# Altium PCB slave-14-mc33775.PcbDoc (part 1 of 5)
Units mil, origin at the board's own origin, x right, y up, seen from the top; angles counter-clockwise.
Board outline 6512.5 x 4562.01 mil, 6 copper layers (Top Copper, Supply, Signal Layer 1, Signal Layer 2, GND, Bot Copper), stack 69.773 mil thick; 427 components, 0 nets, 1131 pads, 1672 vias.
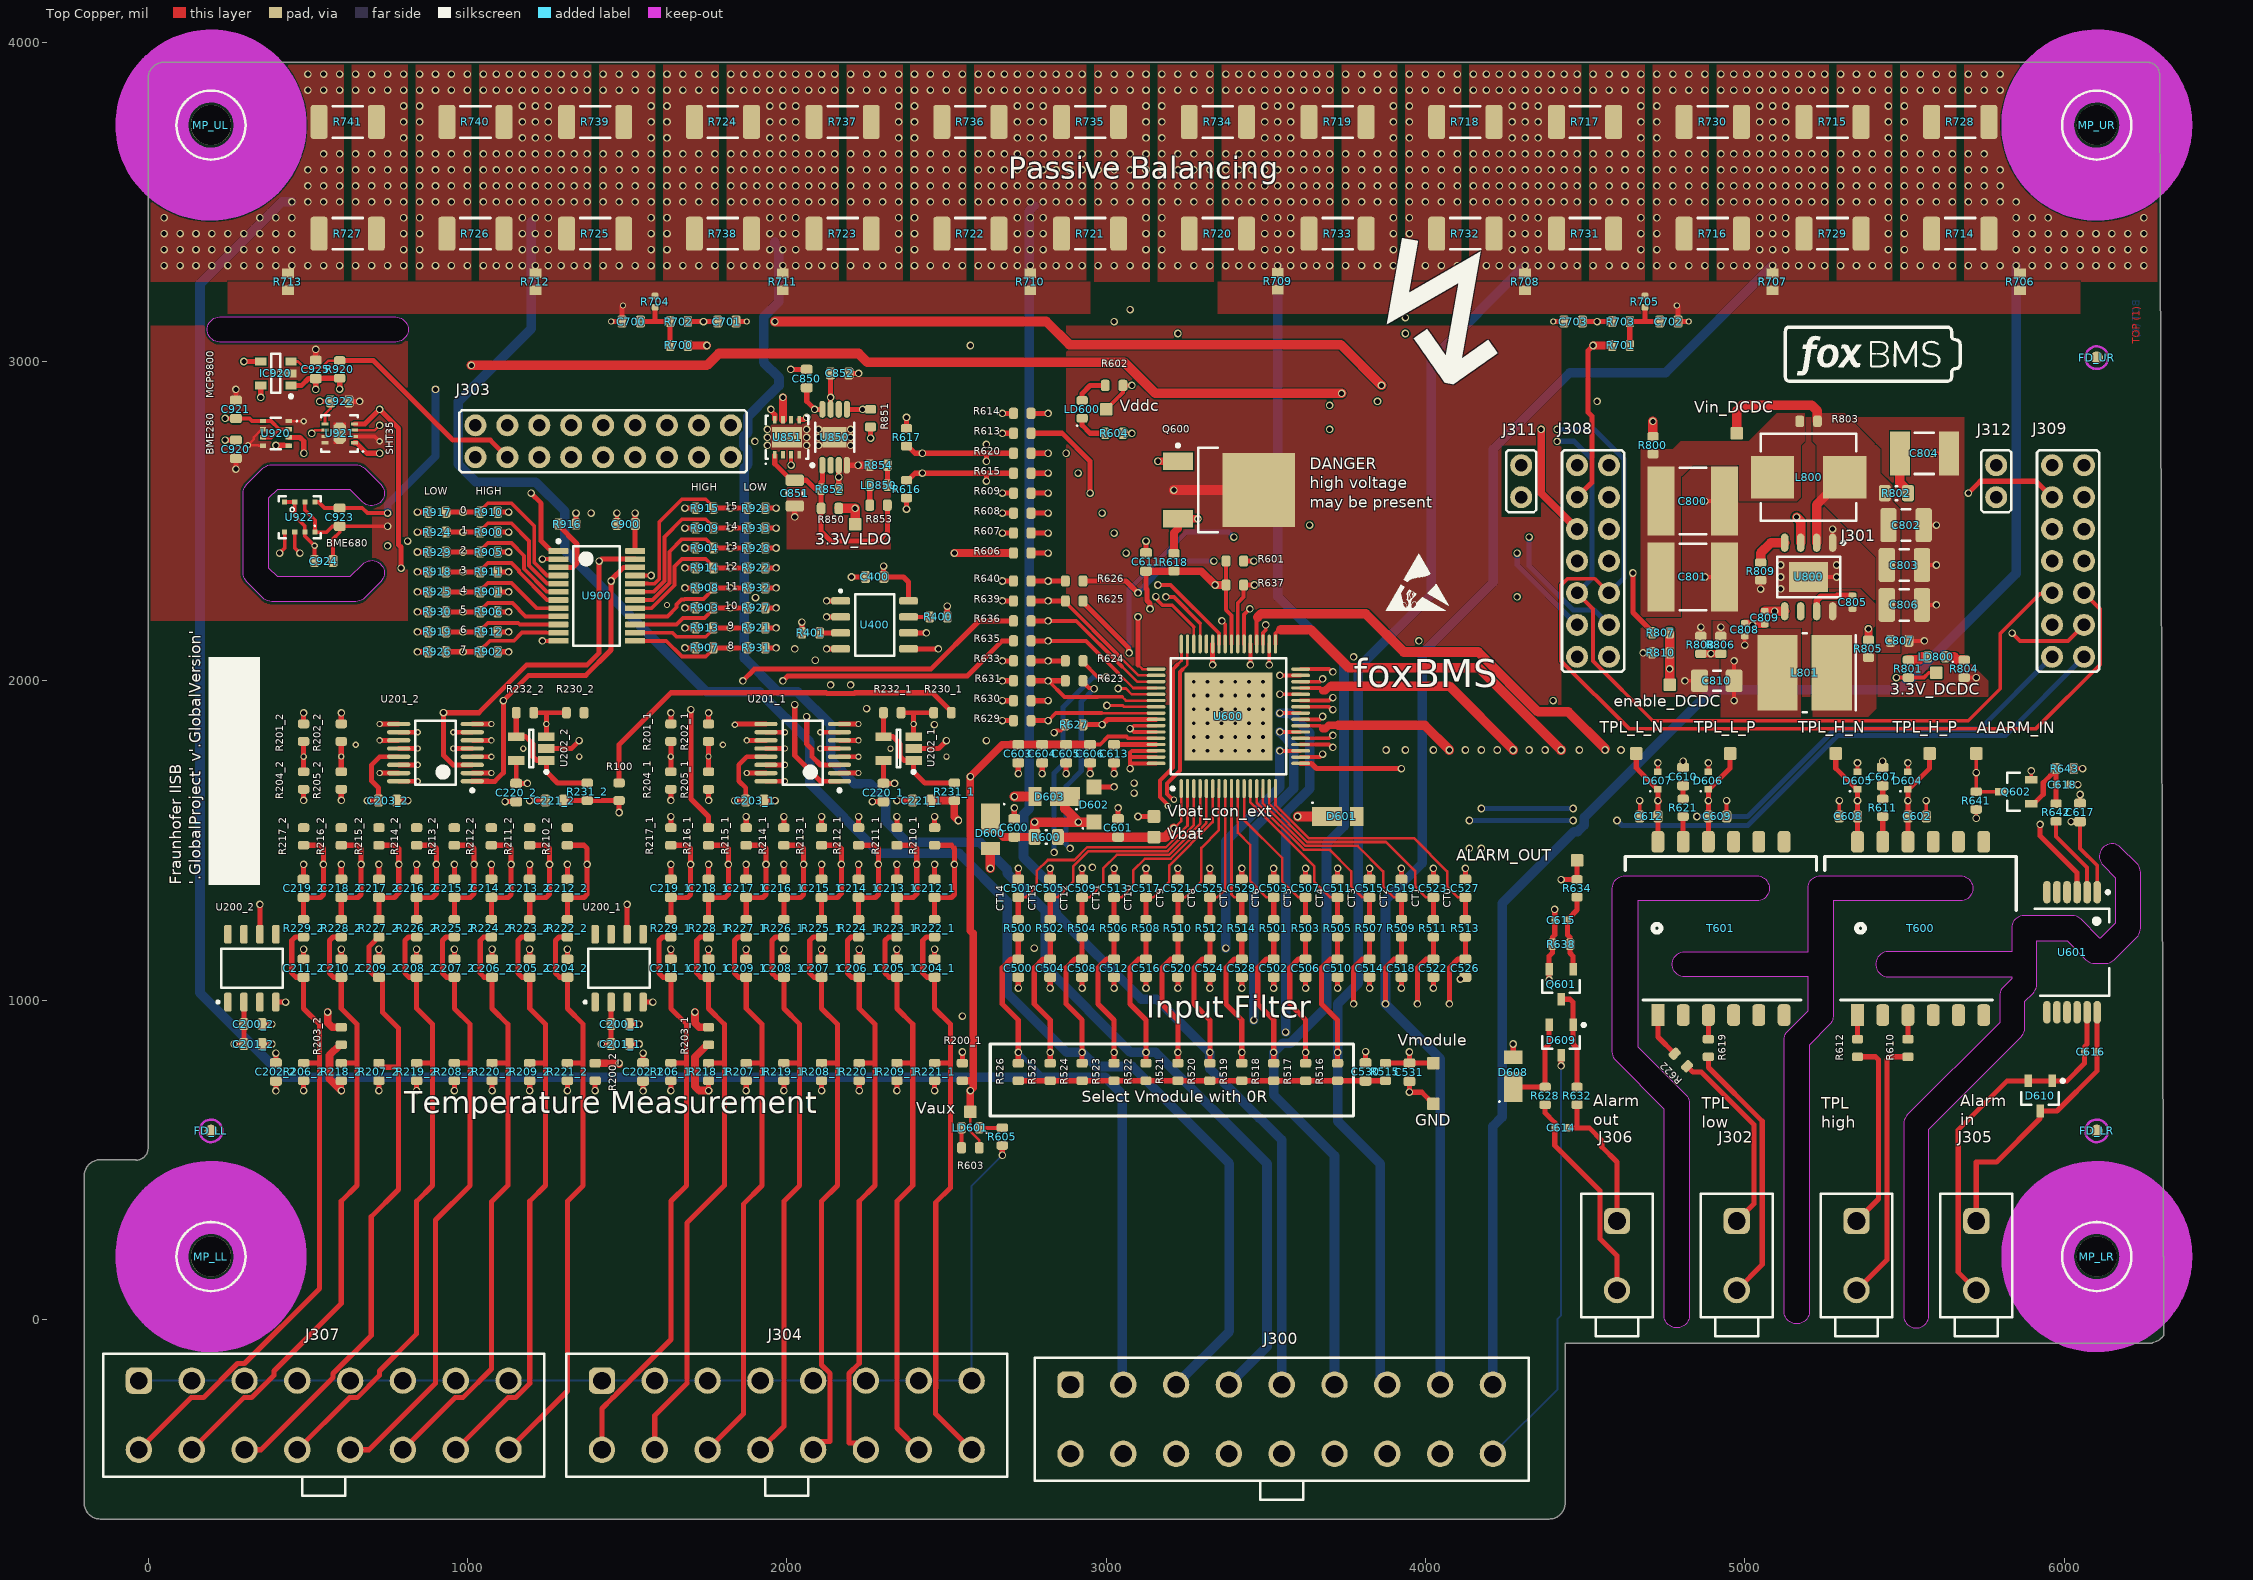
[diagram p0: Top Copper view]
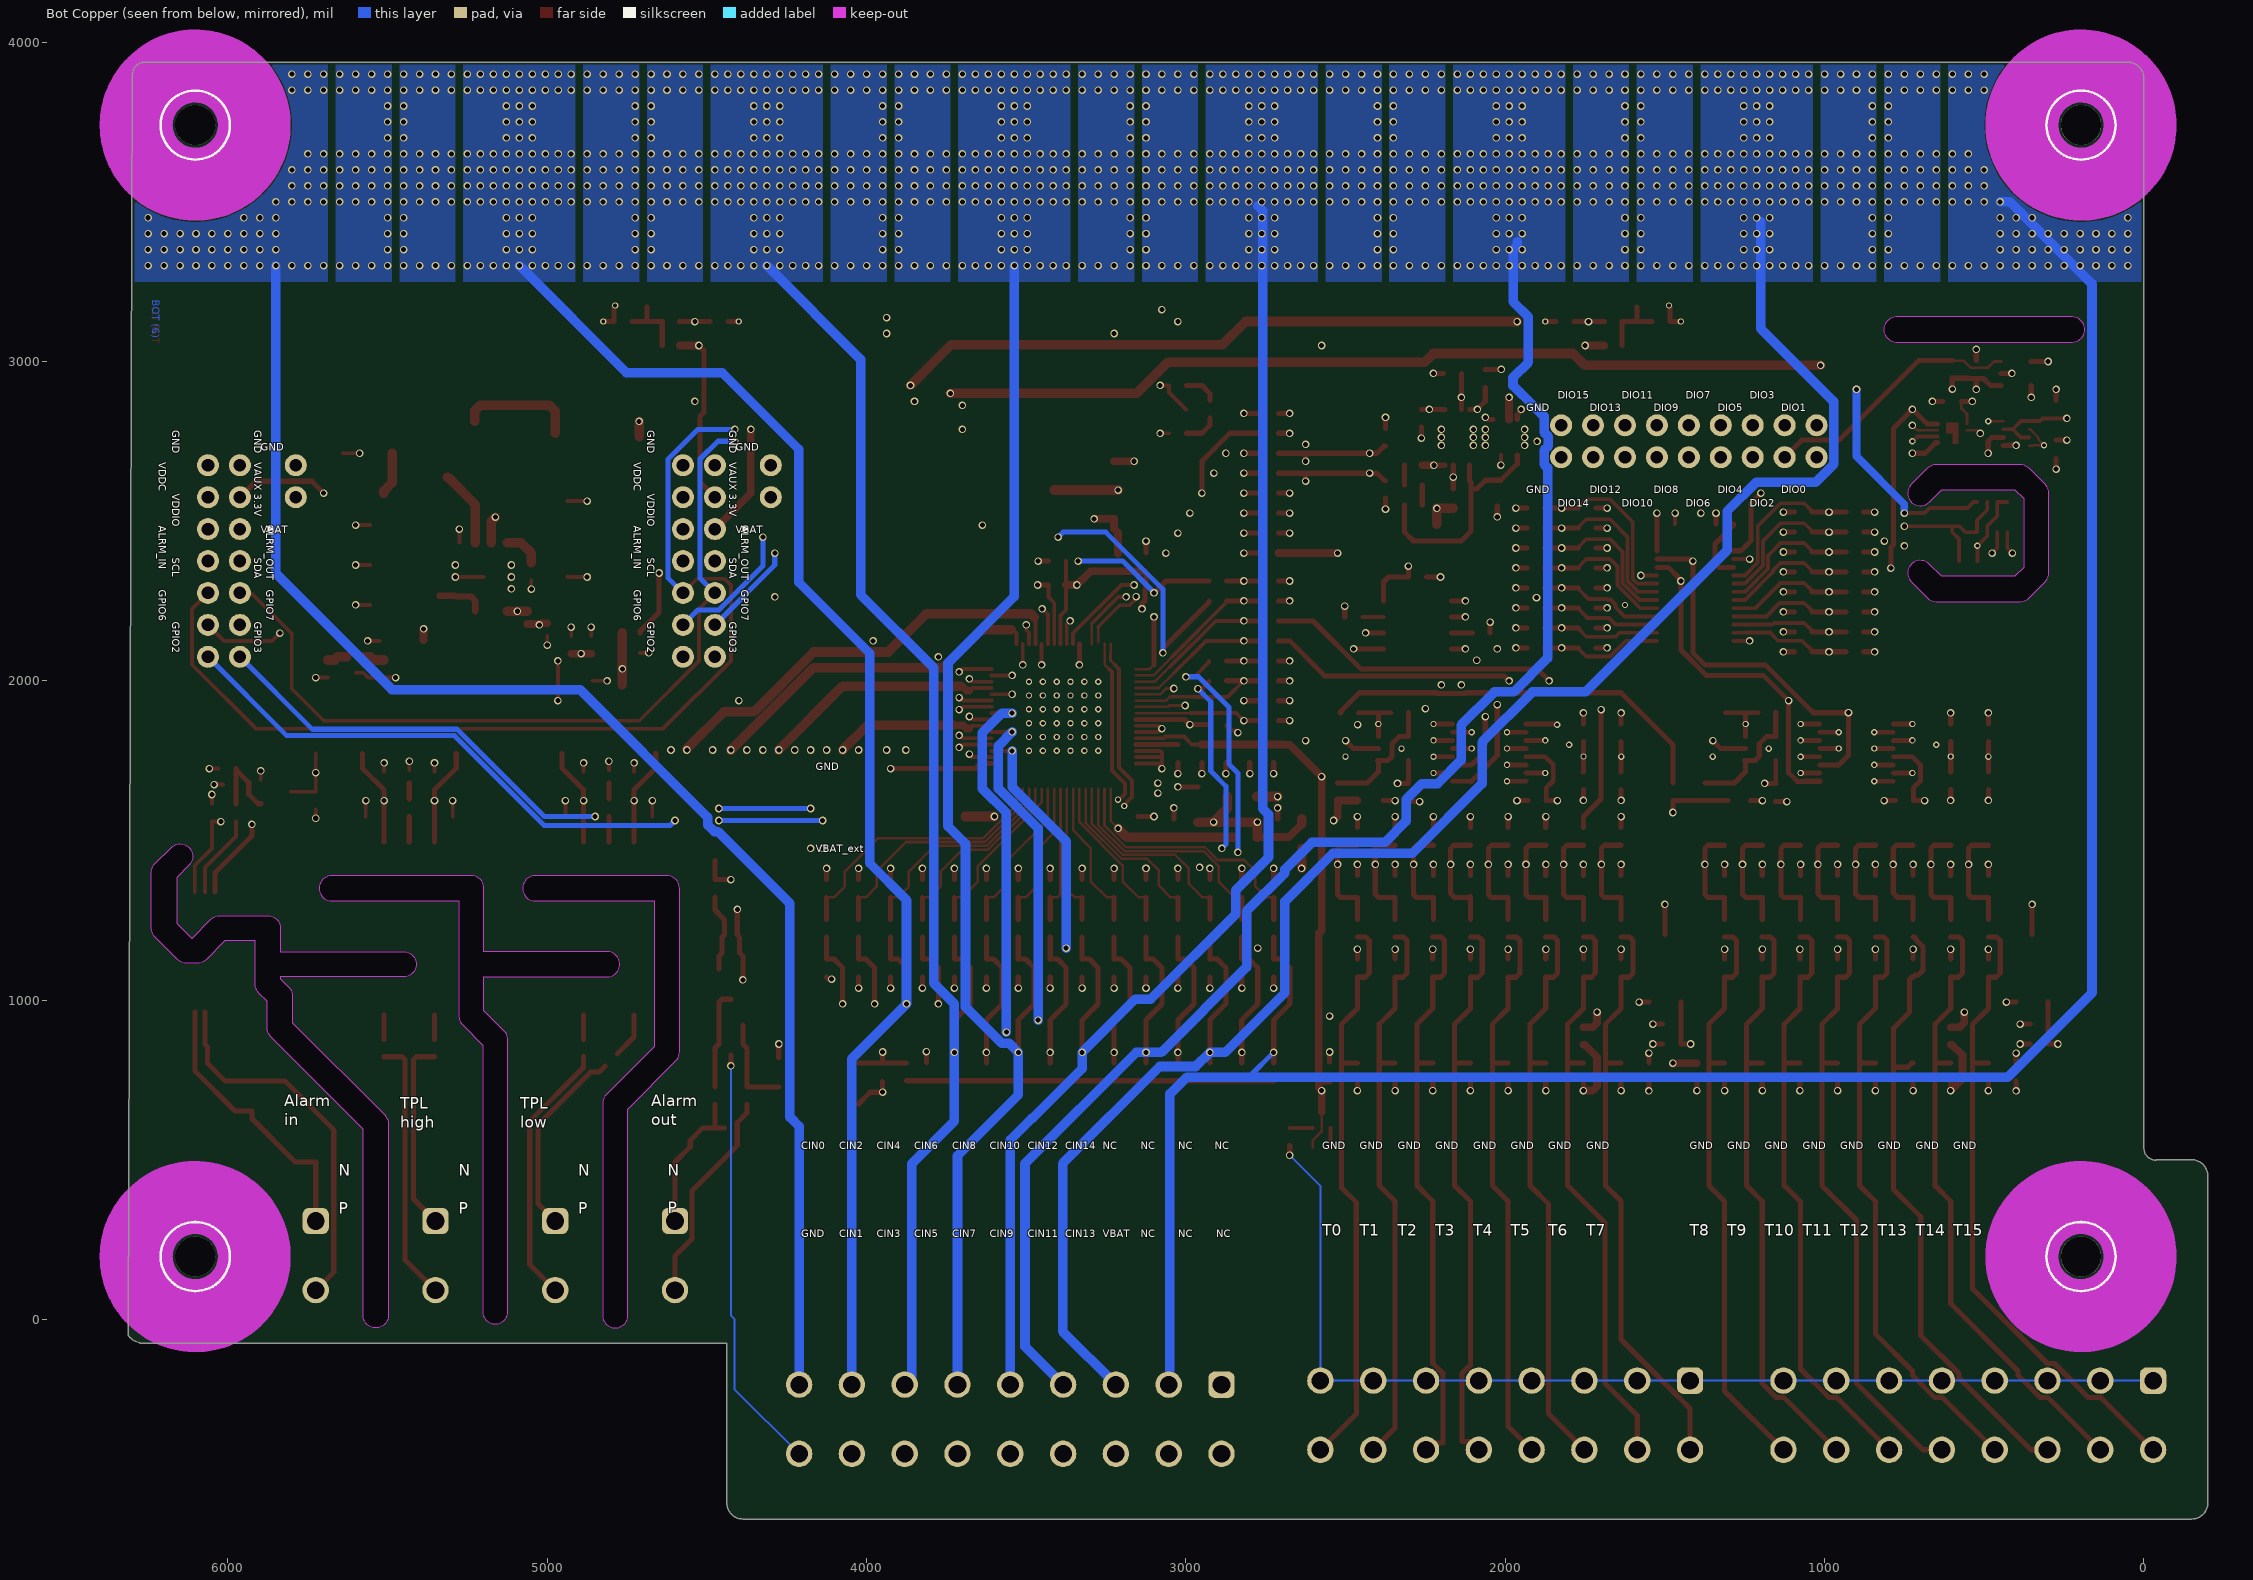
[diagram p1: Bot Copper view, seen from below]
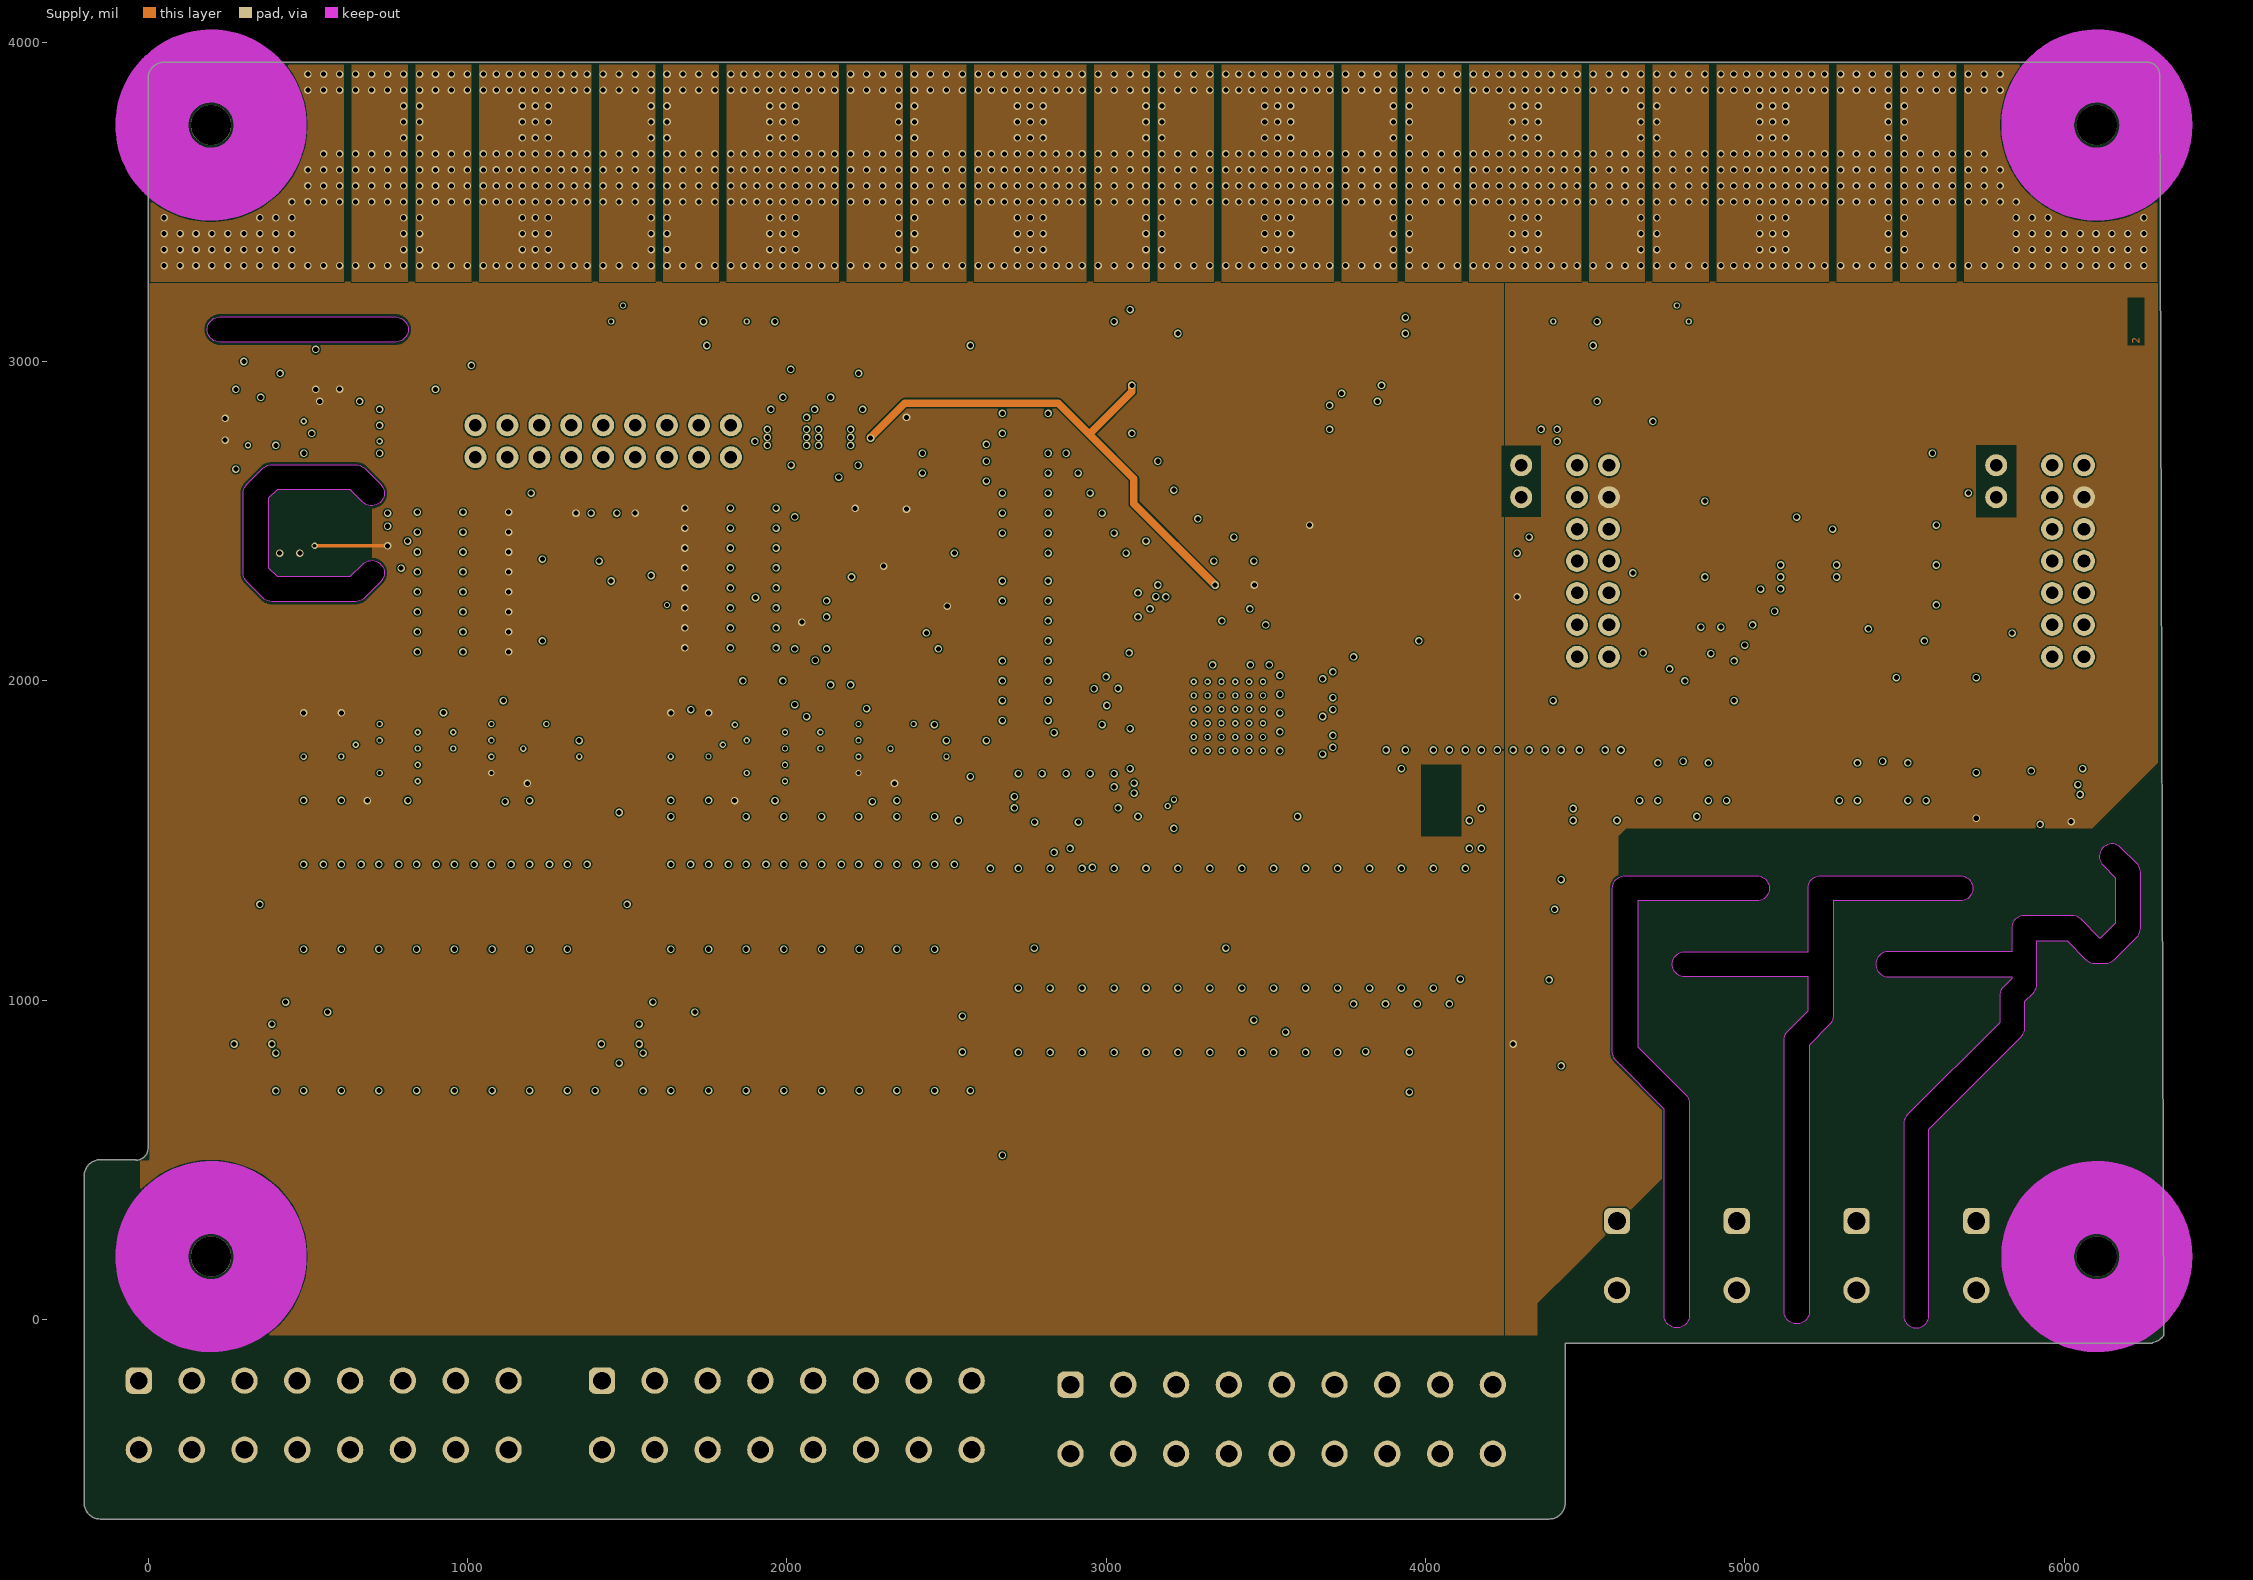
[diagram p2: Supply]
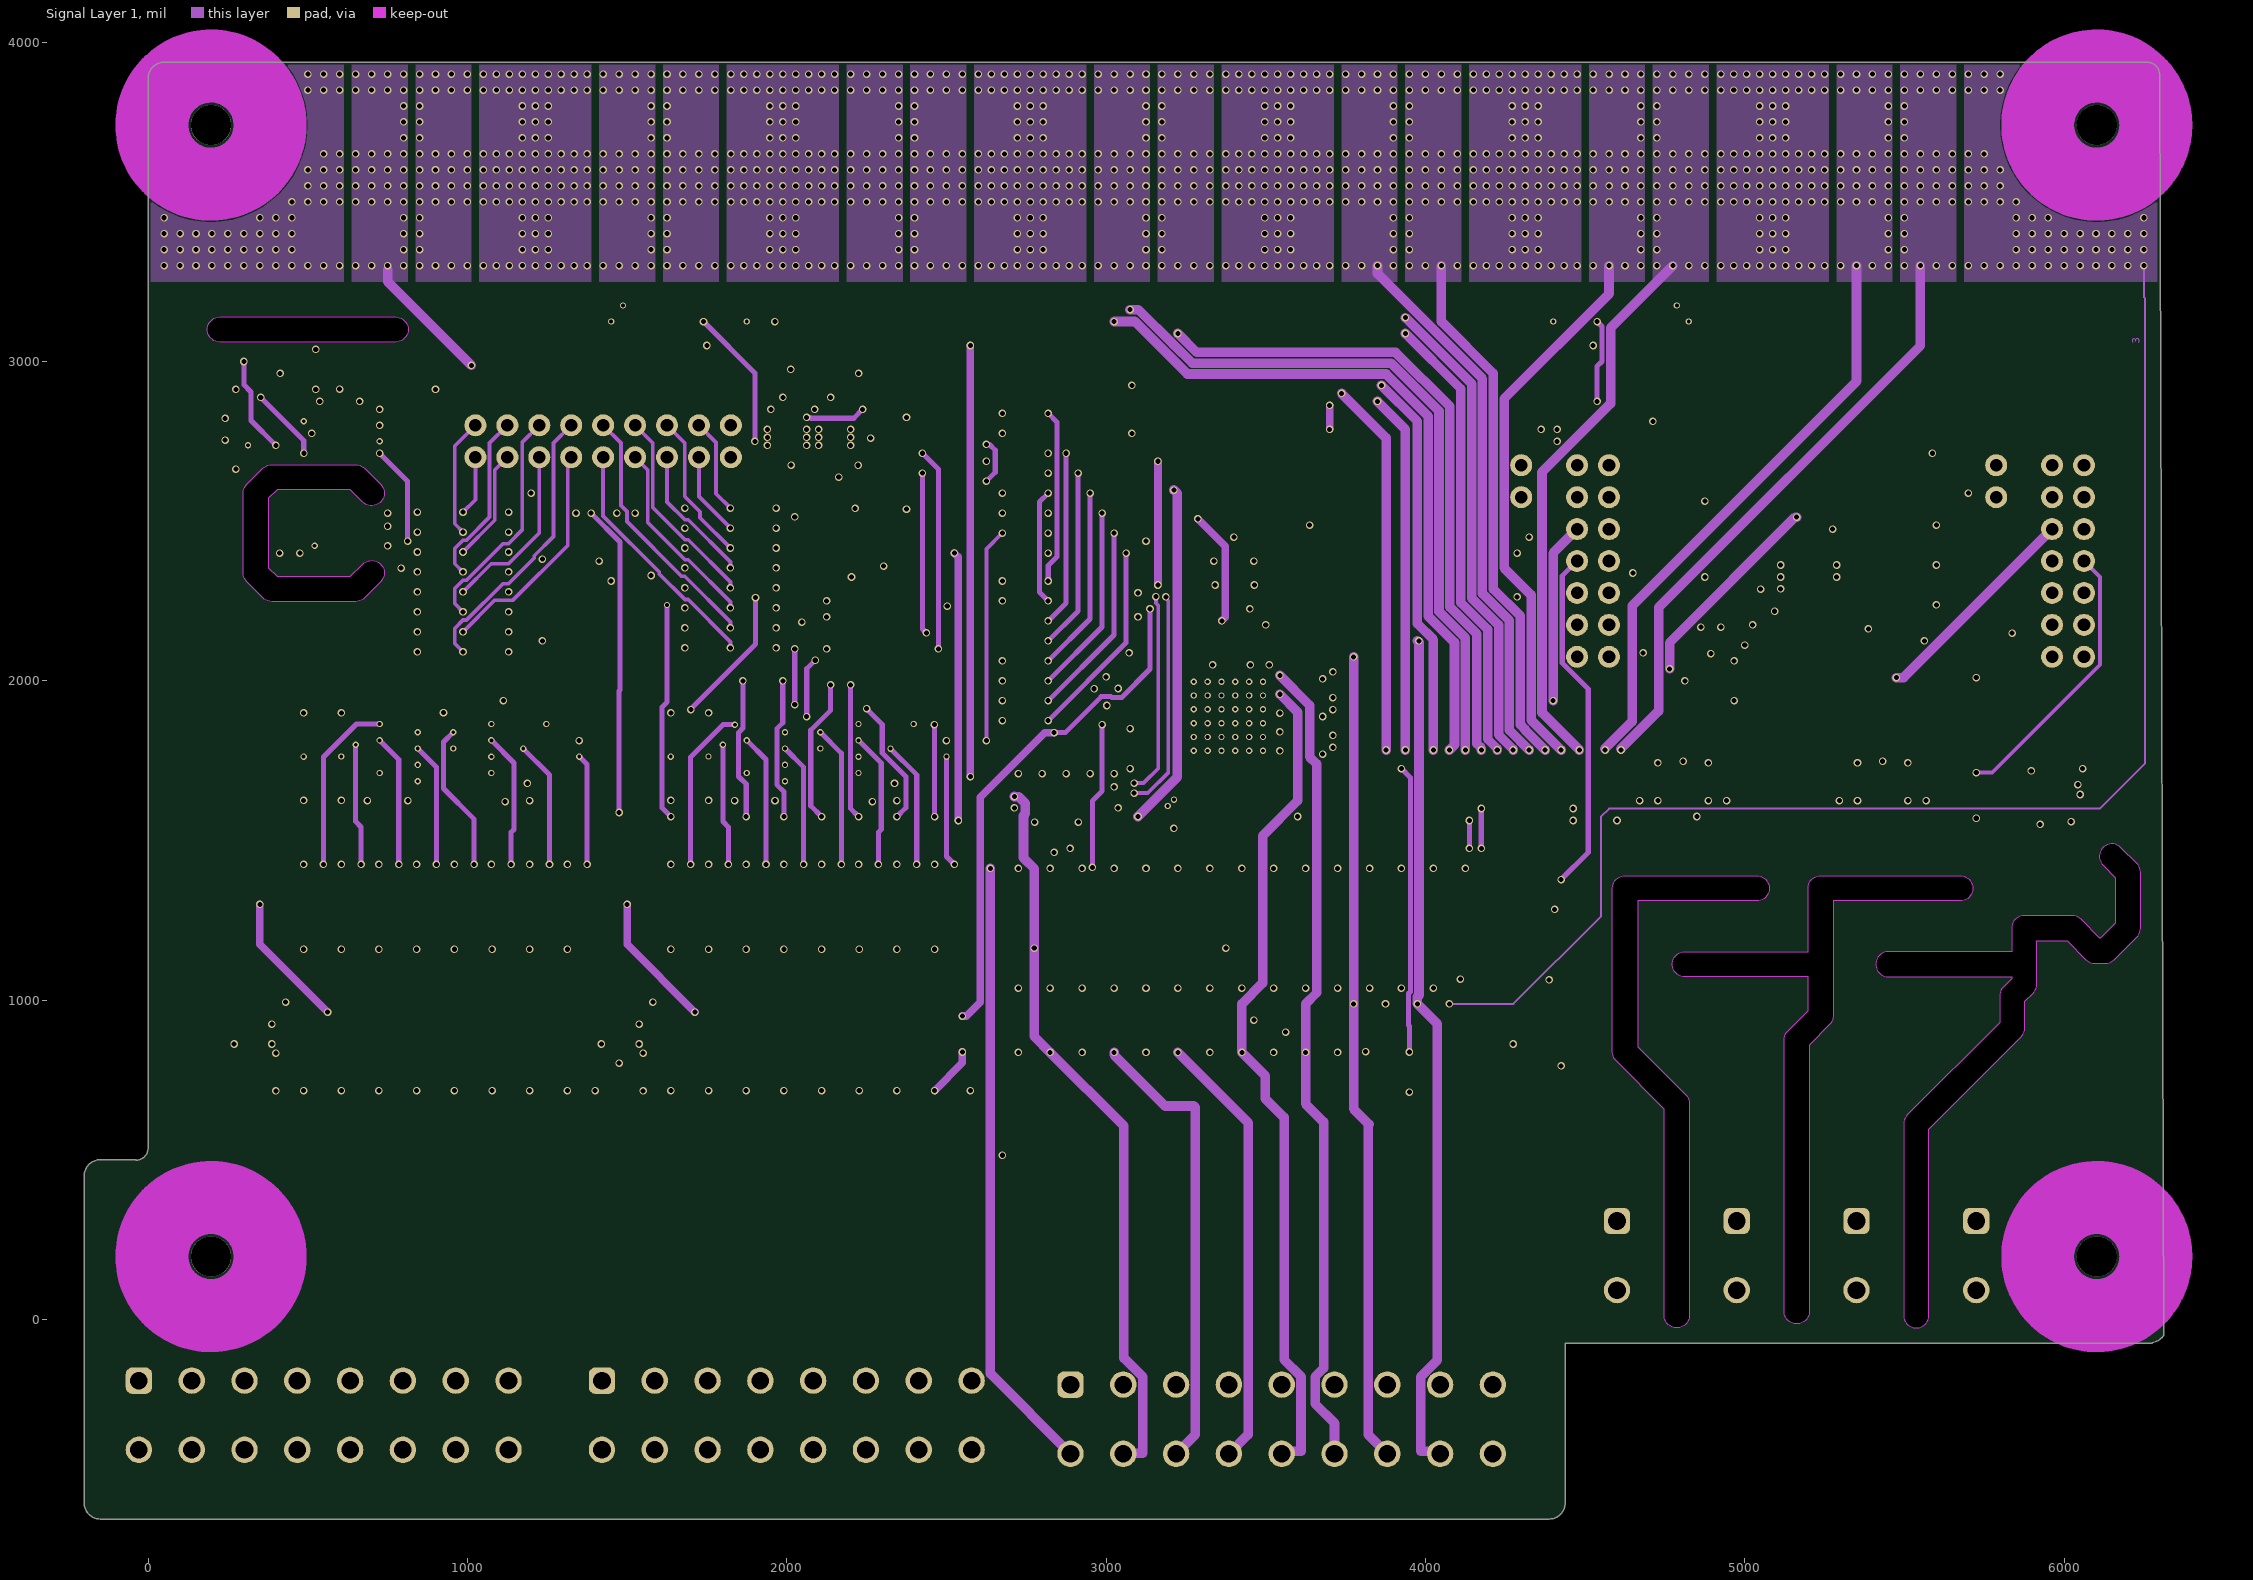
[diagram p3: Signal Layer 1]
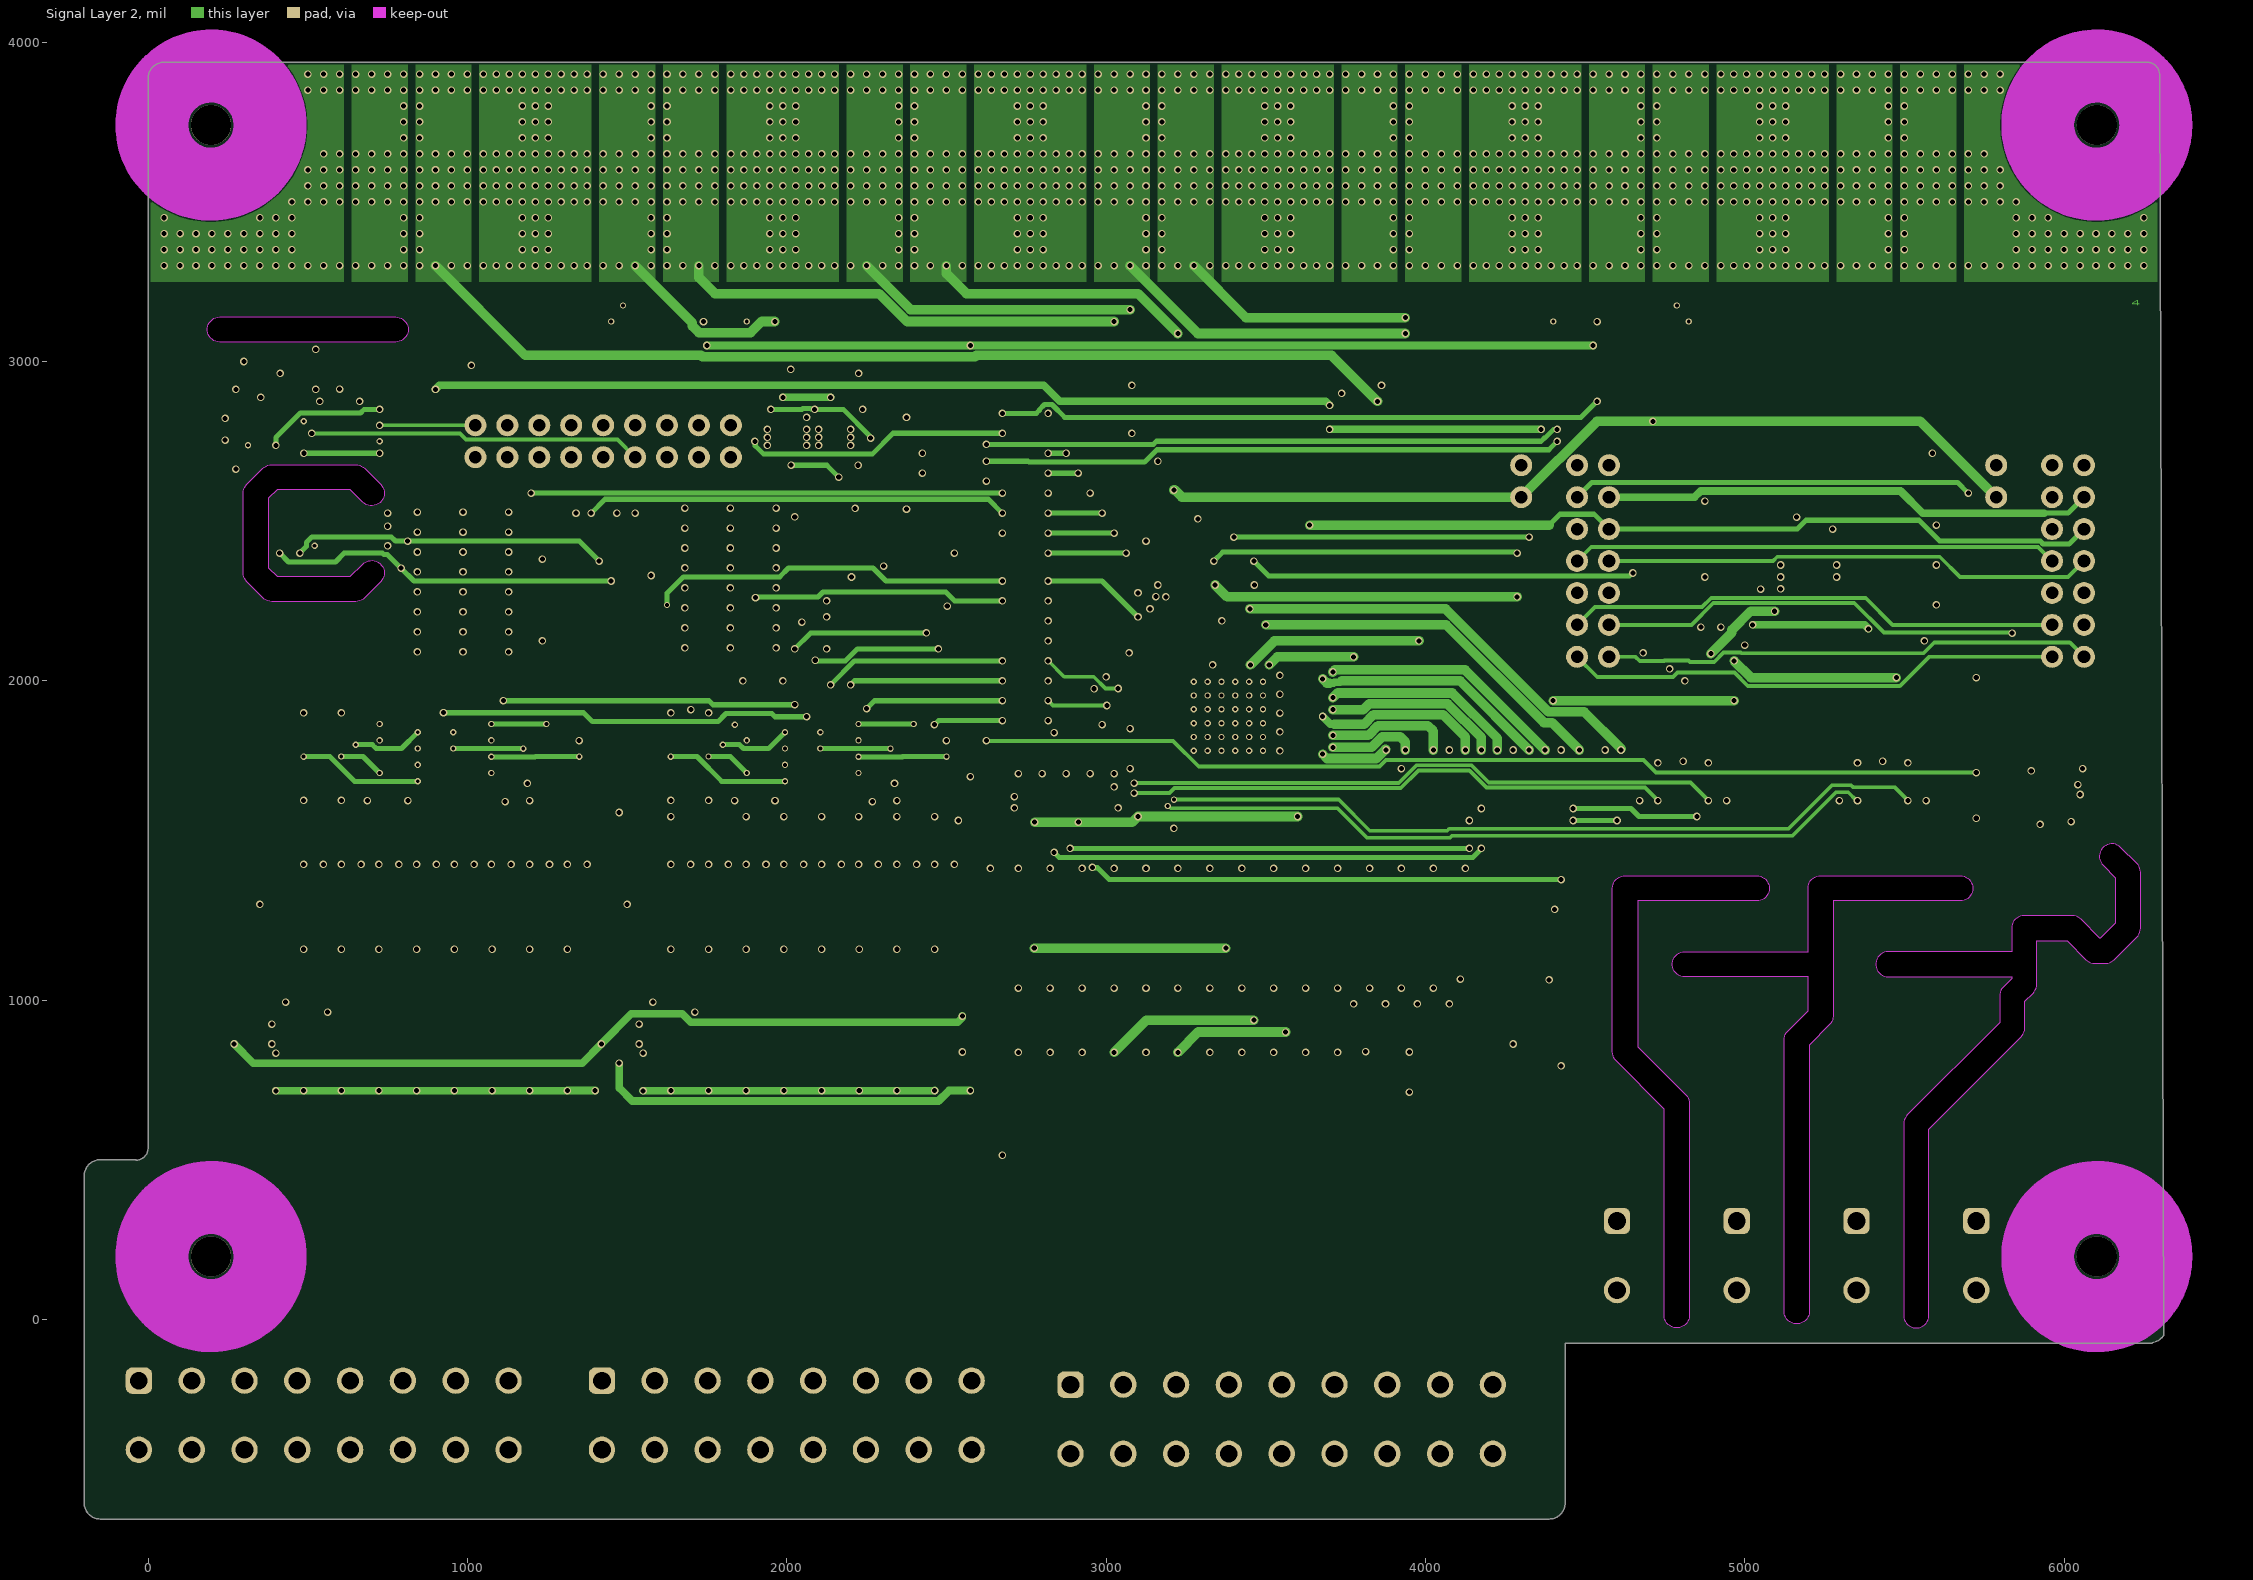
[diagram p4: Signal Layer 2]
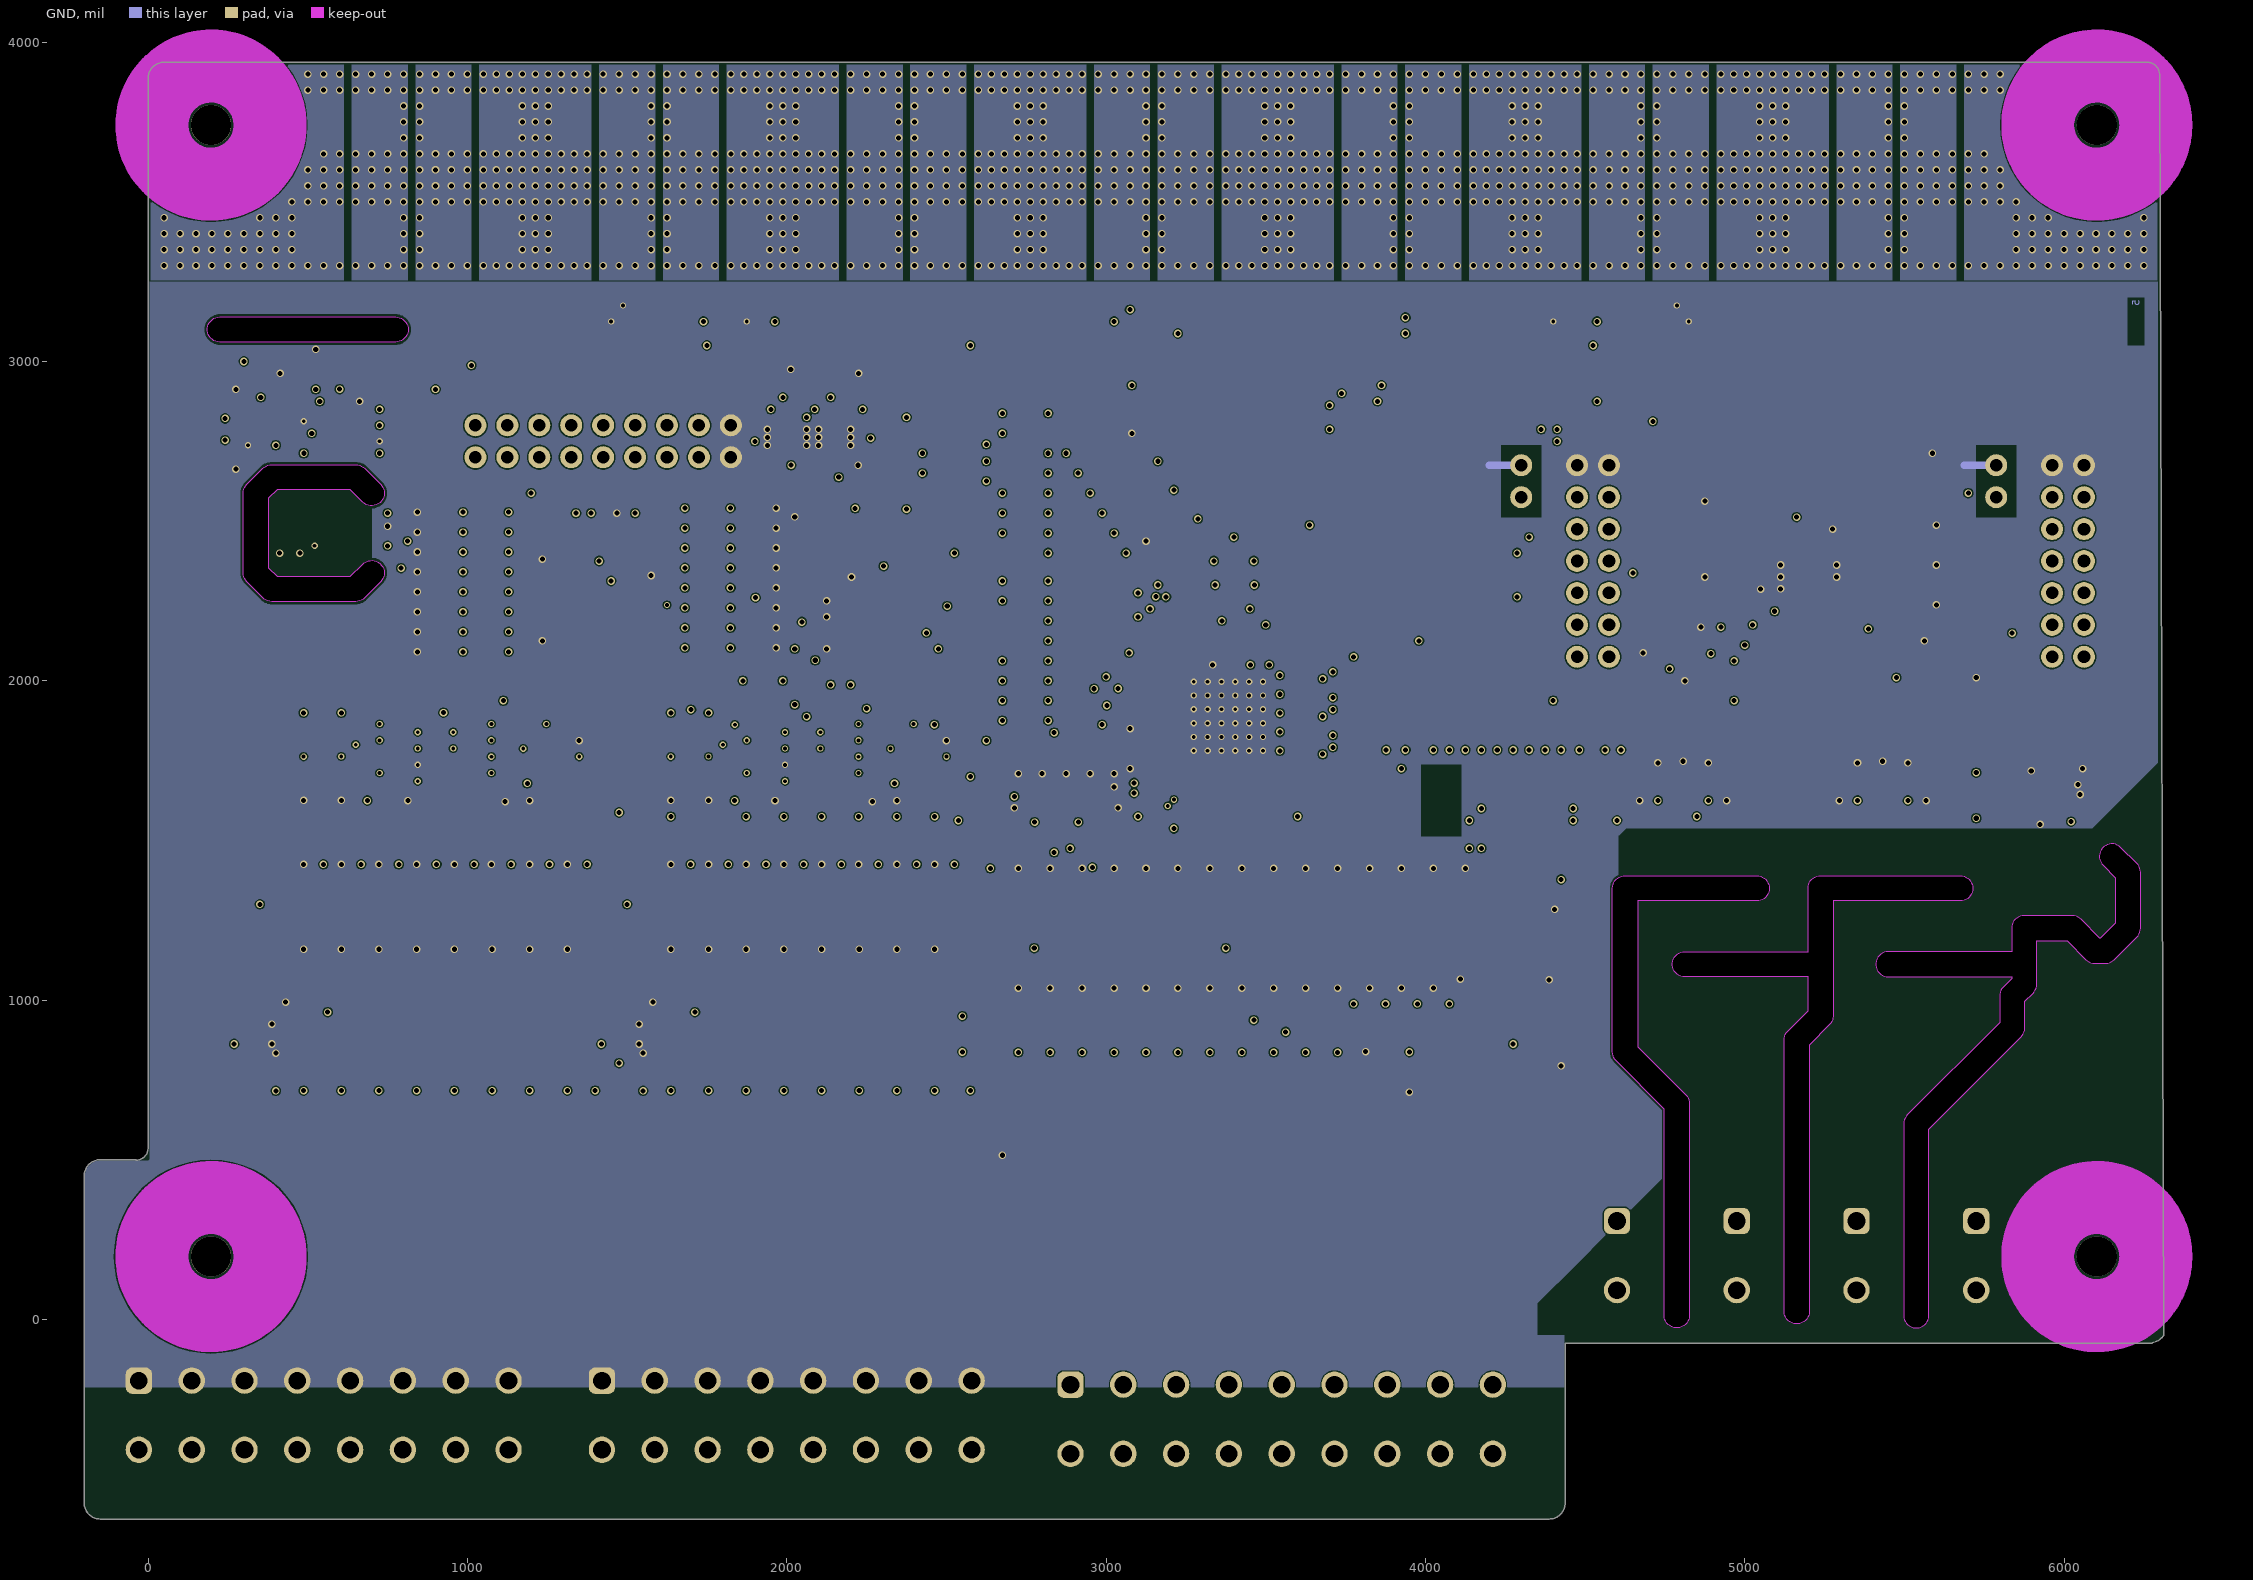
[diagram p5: GND]

## Layer stack, top to bottom
Top Solder: solder mask 0.591, Solder Resist, Dk 3.5
Top Copper: signal copper 1.378
Dielectric 1: prepreg 14.173, FR-4, Dk 4.6
Supply: signal copper 1.378
Dielectric 4: prepreg 2.8, PP-006, Dk 4.1
Signal Layer 1: signal copper 1.378
Dielectric 2: core 27.559, FR-4, Dk 4.6
Signal Layer 2: signal copper 1.378
Dielectric 5: prepreg 2.8, PP-006, Dk 4.1
GND: signal copper 1.378
Dielectric 3: prepreg 14.173, FR-4, Dk 4.6
Bot Copper: signal copper 1.378
Bottom Solder: solder mask 0.591, Solder Resist, Dk 3.5

## Board outline
-200,-575 -200,450 cw(c-150,450) -150,500 -37.5,500 -39.37,498.13 ccw(c-39.37,537.5) 0,537.5 0,3887.01 cw(c50,3887.01) 50,3937.01 6259.84,3937.01 cw(c6259.84,3897.64) 6299.21,3897.64 6312.42,-50 6312.5,-50 cw(c6262.92,-12.92) 6276.09,-73.41 6275,-75 4437.5,-75 4437.5,-575 cw(c4387.5,-575) 4387.5,-625 -150,-625 cw(c-150,-575)
cut-out: 5123.11,25 5123.11,875 cw(c5162.5,875) 5134.65,902.85 5198.11,966.31 5198.11,1073.11 4812.5,1073.11 cw(c4812.5,1112.5) 4812.5,1151.89 5198.11,1151.89 5198.11,1350 cw(c5237.5,1350) 5237.5,1389.39 5675,1389.39 cw(c5675,1350) 5714.39,1350 cw(c5675,1350) 5675,1310.61 5276.89,1310.61 5276.89,950 cw(c5237.5,950) 5265.35,922.15 5201.89,858.69 5201.89,25 cw(c5162.5,25)
cut-out: 5498.11,12.5 ccw(c5537.5,12.5) 5576.89,12.5 5576.89,596.19 5865.35,884.65 ccw(c5837.5,912.5) 5876.89,912.5 5876.89,996.19 5902.85,1022.15 ccw(c5875,1050) 5914.39,1050 5914.39,1185.61 6009.46,1185.61 6067.94,1127.13 ccw(c6095.79,1154.98) 6095.79,1115.6 6129.98,1115.6 ccw(c6129.98,1154.98) 6157.83,1127.13 6227.85,1197.15 ccw(c6200,1225) 6239.39,1225 6239.39,1400 ccw(c6200,1400) 6227.85,1427.85 6177.85,1477.85 ccw(c6150,1450) 6122.15,1422.15 6160.61,1383.69 6160.61,1241.31 6113.67,1194.37 6112.11,1194.37 6053.62,1252.85 ccw(c6025.77,1225) 6025.77,1264.39 ccw(c6025.39,1197.32) 6025,1264.39 5875,1264.39 ccw(c5875,1225) 5835.61,1225 5835.61,1151.89 5450,1151.89 ccw(c5450,1112.5) 5450,1073.11 5835.61,1073.11 5835.61,1066.31 5809.65,1040.35 ccw(c5837.5,1012.5) 5798.11,1012.5 5798.11,928.81 5509.65,640.35 ccw(c5537.5,612.5) 5498.11,612.5
cut-out: 4597.15,809.65 cw(c4625,837.5) 4585.61,837.5 4585.61,1350 cw(c4625,1350) 4625,1389.39 5037.5,1389.39 cw(c5037.5,1350) 5076.89,1350 cw(c5037.5,1350) 5037.5,1310.61 4664.39,1310.61 4664.39,853.81 4815.35,702.85 cw(c4787.5,675) 4826.89,675 4826.89,12.5 cw(c4787.5,12.5) 4748.11,12.5 4748.11,658.69
cut-out: 359.65,2259.65 309.65,2309.65 cw(c337.5,2337.5) 298.11,2337.5 298.11,2587.5 cw(c337.5,2587.5) 309.65,2615.35 359.65,2665.35 cw(c387.5,2637.5) 387.5,2676.89 650,2676.89 cw(c650,2637.5) 677.85,2665.35 727.85,2615.35 cw(c700,2587.5) 739.39,2587.5 cw(c700,2587.5) 672.15,2559.65 633.69,2598.11 403.81,2598.11 376.89,2571.19 376.89,2353.81 403.81,2326.89 633.69,2326.89 672.15,2365.35 cw(c700,2337.5) 739.39,2337.5 cw(c700,2337.5) 727.85,2309.65 677.85,2259.65 cw(c650,2287.5) 650,2248.11 387.5,2248.11 cw(c387.5,2287.5)
cut-out: 225,3060.61 cw(c225,3100) 225,3139.39 775,3139.39 cw(c775,3100) 814.39,3100 cw(c775,3100) 775,3060.61

## Design rules (kind name [scope] priority, off if disabled: settings)
AssemblyTestPointUsage [All] p1 off:
AssemblyTestpoint [(IsPad And (OnTopLayer Or OnBottomLayer)) Or (IsPad And OnMultiLayer)] p1 off: testpointundercomponent=FALSE minsize=40 maxsize=100 preferedsize=60 minholesize=0 maxholesize=40 preferedholesize=32 testpointgrid=1 usegrid=TRUE gridtolerance=0.01 allowsidetop=TRUE
BoardOutlineClearance [All] p1: gap=8 ignorepadtopadclearanceinfootprint=FALSE except(20: Arc-CavityEdge Track-CavityEdge SMDPad-CavityEdge THPad-CavityEdge Via-CavityEdge Fill-CavityEdge Poly-CavityEdge Region-CavityEdge Text-CavityEdge)
Clearance Clearance_TPL_high [InNetClass('TPL_high') vs Not InNetClass('TPL_high')] p1: gap=43.31 ignorepadtopadclearanceinfootprint=TRUE
Clearance Clearance_TPL_low [InNetClass('TPL_low') vs Not InNetClass('TPL_low')] p2: gap=43.31 ignorepadtopadclearanceinfootprint=TRUE
Clearance Clearance_Alarm_in [InNetClass('ALARM_in') vs Not InNetClass('ALARM_in')] p3: gap=43.31 ignorepadtopadclearanceinfootprint=TRUE
Clearance [All] p4: gap=4 ignorepadtopadclearanceinfootprint=TRUE except(6: Arc-Text Arc-Hole Track-Text Track-Hole SMDPad-Text SMDPad-Hole THPad-Text THPad-Hole Via-Text Via-Hole Fill-Text Fill-Hole Poly-Text Poly-Hole Region-Text Region-Hole Text-Text Text-Hole; 8: Arc-Via Track-Via SMDPad-Via THPad-Via Via-Via)
Creepage Creepage_TPL_high [InNetClass('TPL_high') vs Not InNetClass('TPL_high')] p1: checkdistance=629.92 ignoreinternallayers=FALSE
Creepage Creepage_TPL_low [InNetClass('TPL_low') vs Not InNetClass('TPL_low')] p2: checkdistance=629.92 ignoreinternallayers=FALSE
Creepage Creepage_Alarm_in [InNetClass('ALARM_in') vs Not InNetClass('ALARM_in')] p3: checkdistance=629.92 ignoreinternallayers=FALSE
Creepage [All] p4 off: checkdistance=4
DiffPairsRouting [All] p1: maxlimit=10 minlimit=10 mostfreqgap=10 toplayer_minwidth=8 toplayer_maxwidth=30 toplayer_prefwidth=15 midlayer1_minwidth=8 midlayer1_maxwidth=30 midlayer1_prefwidth=15 midlayer2_minwidth=8 midlayer2_maxwidth=30 midlayer2_prefwidth=15 midlayer3_minwidth=8 midlayer3_maxwidth=30 midlayer3_prefwidth=15 midlayer4_minwidth=8 midlayer4_maxwidth=30 midlayer4_prefwidth=15 bottomlayer_minwidth=8 bottomlayer_maxwidth=30 bottomlayer_prefwidth=15 maxuncoupledlength=500
FabricationTestpoint [All] p1: side=1 testpointundercomponent=TRUE minsize=20 maxsize=300 preferedsize=60 minholesize=0 maxholesize=40 preferedholesize=32 testpointgrid=1 allowsidetop=TRUE usegrid=FALSE gridtolerance=0.01
HoleSize [All] p1: absolutevalues=TRUE maxlimit=236 minlimit=7.87 maxpercent=80.000 minpercent=20.000
HoleToHoleClearance [All] p1: gap=6 allowstackedmicrovias=TRUE
MinimumAnnularRing [All] p1: minimumring=3.93
MinimumSolderMaskSliver [All] p1: minsoldermaskwidth=4
PlaneConnect [All] p1: planeconnectstyle=Direct reliefexpansion=20 reliefentries=4 reliefconductorwidth=10 reliefairgap=10
PolygonConnect [All] p1: connectstyle=Direct reliefconductorwidth=10 reliefentries=4 polygonreliefangle="90 Angle" airgapwidth=10
RoomDefinition U_analog_in_bank1 [InComponentClass('U_analog_in_bank1')] p1: confinementstyle=ConfineIn formatcopy=TRUE lockcomponents=FALSE outline 200.83,944.33 200.83,1255.67 446.5,1255.67 446.5,1414.13 448.46,1414.13 448.46,1899.67 717.76,1899.67 717.76,1906.06 1118.15,1906.06 1118.15,1938.54 1399.67,1938.54 1399.67,1714.72 1413.54,1714.72 1413.54,837.17 1438.54,837.17 1438.54,712.83 1351.54,712.83 440.51,712.83 440.51,710.87 359.49,710.87 359.49,821.99 264.41,821.99 264.41,944.33
RoomDefinition U_sensors [InComponentClass('U_sensors')] p2: confinementstyle=ConfineIn formatcopy=TRUE lockcomponents=FALSE outline 234.49,2660.87 234.49,2789.13 234.49,2914.13 320.12,2914.13 320.12,3038.44 484.49,3038.44 484.49,3039.13 565.51,3039.13 565.51,3037.17 638.54,3037.17 638.54,2915.51 664.13,2915.51 664.13,2847.01 686.77,2847.01 686.77,2702.99 640.51,2702.99 640.51,2448.37 614.13,2448.37 614.13,2334.49 485.87,2334.49 485.87,2430.65 393.15,2430.65 393.15,2660.87
RoomDefinition U_passive_balancing [InComponentClass('U_passive_balancing')] p3: confinementstyle=ConfineIn formatcopy=TRUE lockcomponents=FALSE outline 396.99,3187.83 396.99,3312.17 488.03,3312.17 488.03,3823.98 888.03,3823.98 5811.97,3823.98 5811.97,3312.17 5903.01,3312.17 5903.01,3187.83 4826.63,3187.83 4826.63,3084.49 4674.67,3084.49 4674.67,3011.46 1600.33,3011.46 1600.33,3084.49 1448.37,3084.49 1448.37,3187.83
RoomDefinition U_ldo [InComponentClass('U_ldo')] p4: confinementstyle=ConfineIn formatcopy=TRUE lockcomponents=FALSE outline 1919.04,2665.89 1919.04,2856.36 2021.99,2856.36 2021.99,3010.59 2103.01,3010.59 2103.01,3003.01 2229.88,3003.01 2229.88,2897.5 2231.85,2897.5 2231.85,2884.7 2301.04,2884.7 2301.04,2713.54 2349.67,2713.54 2349.67,2651.04 2352.62,2651.04 2352.62,2573.96 2349.67,2573.96 2349.67,2511.46 2245.86,2511.46 2245.86,2458.75 2182.49,2458.75 2182.49,2501.25 2073.07,2501.25 2073.07,2509.59 1974.65,2509.59 1974.65,2665.89
RoomDefinition U_input_filter [InComponentClass('U_input_filter')] p5: confinementstyle=ConfineIn formatcopy=TRUE lockcomponents=FALSE outline 2684.49,1035.87 2684.49,1164.13 2684.49,1414.13 4165.51,1414.13 4165.51,1285.87 4165.51,1035.87 3990.51,1035.87 3990.51,709.88 3909.49,709.88 3909.49,712.83 2686.46,712.83 2686.46,1035.87
RoomDefinition U_eeprom [InComponentClass('U_eeprom')] p6: confinementstyle=ConfineIn formatcopy=TRUE lockcomponents=FALSE outline 2012.83,2111.46 2012.83,2188.54 2119.33,2188.54 2119.33,2299.17 2210.87,2299.17 2210.87,2365.51 2339.13,2365.51 2339.13,2299.17 2430.67,2299.17 2430.67,2238.54 2537.17,2238.54 2537.17,2161.46 2430.67,2161.46 2430.67,2057.72 2119.33,2057.72 2119.33,2111.46
RoomDefinition U_digital_io [InComponentClass('U_digital_io')] p7: confinementstyle=ConfineIn formatcopy=TRUE lockcomponents=FALSE outline 842.76,2052.2 842.76,2566.79 1680.26,2566.79 1680.26,2579.29 1967.09,2579.29 1967.09,2064.7 1129.59,2064.7 1129.59,2052.2
RoomDefinition U_dcdc-converter [InComponentClass('U_dcdc-converter')] p8: confinementstyle=ConfineIn formatcopy=TRUE lockcomponents=FALSE outline 4673.96,2675.33 4673.96,2799.67 4943.32,2799.67 4943.32,2806.68 5137.83,2806.68 5137.83,2851.04 5262.17,2851.04 5262.17,2804 5411.77,2804 5411.77,2802.22 5691.59,2802.22 5691.59,2099.67 5726.04,2099.67 5726.04,1975.33 5551.04,1975.33 5360.89,1975.33 5360.89,1880.16 5020.02,1880.16 5020.02,1943.74 4810.96,1943.74 4810.96,1955.82 4733.37,1955.82 4733.37,2048.96 4675.33,2048.96 4675.33,2195.91 4674.94,2195.91 4674.94,2675.33
RoomDefinition U_analog_in_bank0 [InComponentClass('U_analog_in_bank0')] p9: confinementstyle=ConfineIn formatcopy=TRUE lockcomponents=FALSE outline 1350.83,944.33 1350.83,1255.67 1596.5,1255.67 1596.5,1414.13 1598.46,1414.13 1598.46,1899.67 1867.76,1899.67 1867.76,1906.06 2268.15,1906.06 2268.15,1938.54 2549.67,1938.54 2549.67,1714.72 2563.54,1714.72 2563.54,837.17 2588.54,837.17 2588.54,712.83 1590.51,712.83 1590.51,710.87 1509.49,710.87 1509.49,821.99 1414.41,821.99 1414.41,944.33
RoutingVias [All] p1: holewidth=8 width=17.72 viastyle="Through Hole" minholewidth=8 minwidth=17.72 maxholewidth=39.37 maxwidth=275.59 useviatemplates=TRUE viatemplateguid#1={F81AEFC7-3C62-4E62-9F19-F0C0822CA78E} viatemplatename#1=0.4mm_tented
SMDEntry [All] p1: side=TRUE corner=TRUE anyangle=FALSE
SMDToCorner [All] p1: distance=40000
SilkToSolderMaskClearance [IsPad] p1: minsilkscreentomaskgap=4 clearancetoexposedcopper=FALSE
SolderMaskExpansion SolderMaskExpansion_VIAs [IsVia] p1: expansion=-393.7 istentingtop=FALSE // Cover all Vias
SolderMaskExpansion [All] p2: expansion=2 istentingtop=FALSE
SupplyNets "Schematic Supply Nets_10" [InNet('VBAT_con')] p1: voltage=0.000
SupplyNets "Schematic Supply Nets_9" [InNet('VDDIO')] p2: voltage=0.000
SupplyNets "Schematic Supply Nets_8" [InNet('VBAT')] p3: voltage=0.000
SupplyNets "Schematic Supply Nets_7" [InNet('VDDA')] p4: voltage=0.000
SupplyNets "Schematic Supply Nets_6" [InNet('VBAT_con_ext')] p5: voltage=0.000
SupplyNets "Schematic Supply Nets_5" [InNet('+3.3V')] p6: voltage=0.000
SupplyNets "Schematic Supply Nets_4" [InNet('VDDC')] p7: voltage=0.000
SupplyNets "Schematic Supply Nets_3" [InNet('VBAT_ext')] p8: voltage=0.000
SupplyNets "Schematic Supply Nets_2" [InNet('VAUX')] p9: voltage=0.000
SupplyNets "Schematic Supply Nets_1" [InNet('VMODULE')] p10: voltage=0.000
SupplyNets "Schematic Supply Nets" [InNet('GND')] p11: voltage=0.000
UnRoutedNet [All] p1: checkbadconnections=TRUE
UnpouredPolygon UnpouredPolygon_1 [All] p1:
Width [All] p1: maxlimit=60 minlimit=4 preferedwidth=6
19 further rules are at their usual default settings.

## Classes and differential pairs
component class U_ldo: 3.3V_LDO C850 C851 C852 LD850 R850 R851 R852 R853 R854 U850 U851
component class slave-14-mc33775: MP_LL MP_LR MP_UL MP_UR R100
channel class analog_in: U_analog_in_bank0 U_analog_in_bank1
component class U_sensors: C920 C921 C922 C923 C924 C925 IC920 R920 U920 U921 U922
component class U_digital_io: C900 R900 R901 R902 R903 R904 R905 R906 R907 R908 R909 R910 R911 R912 R913 R914 R915 R916 R917 R918 R919 R921 R922 R923 R924 R925 R926 R927 R928 R929 R930 R931 R932 R933 U900
component class U_dcdc-converter: 3.3V_DCDC C800 C801 C802 C803 C804 C805 C806 C807 C808 C809 C810 enable_DCDC L800 L801 LD800 R800 R801 R802 R803 R804 R805 R806 R807 R808 R809 R810 U800 Vin_DCDC
component class U_analog_in_bank1: C200_2 C201_2 C202_2 C203_2 C204_2 C205_2 C206_2 C207_2 C208_2 C209_2 C210_2 C211_2 C212_2 C213_2 C214_2 C215_2 C216_2 C217_2 C218_2 C219_2 C220_2 C221_2 R200_2 R201_2 R202_2 R203_2 R204_2 R205_2 R206_2 R207_2 R208_2 R209_2 R210_2 R211_2 R212_2 R213_2 R214_2 R215_2 R216_2 R217_2 R218_2 R219_2 R220_2 R221_2 R222_2 R223_2 R224_2 R225_2 R226_2 R227_2 R228_2 R229_2 R230_2 R231_2 R232_2 U200_2 U201_2 U202_2
differential pair class TPL_H: TPL_H.
component class U_passive_balancing: C700 C701 C702 C703 R700 R701 R702 R703 R704 R705 R706 R707 R708 R709 R710 R711 R712 R713 R714 R715 R716 R717 R718 R719 R720 R721 R722 R723 R724 R725 R726 R727 R728 R729 R730 R731 R732 R733 R734 R735 R736 R737 R738 R739 R740 R741
component class U_mc33775: ALARM_IN ALARM_OUT C600 C601 C602 C603 C604 C605 C606 C607 C608 C609 C610 C611 C612 C613 C614 C615 C616 C617 C618 D600 D601 D602 D603 D604 D605 D606 D607 D608 D609 D610 GND LD600 LD601 Q600 Q601 Q602 R600 R601 R602 R603 R604 R605 R606 R607 R608 R609 R610 R611 R612 R613 R614 R615 R616 R617 R618 R619 R620 R621 R622 R623 R624 R625 R626 R627 R628 R629 R630 R631 R632 R633 R634 R635 R636 R637 R638 R639 R640 R641 R642 R643 T600 T601 TPL_H_N TPL_H_P TPL_L_N TPL_L_P U600 U601 Vaux Vbat Vbat_con_ext Vddc Vmodule
component class U_input_filter: C500 C501 C502 C503 C504 C505 C506 C507 C508 C509 C510 C511 C512 C513 C514 C515 C516 C517 C518 C519 C520 C521 C522 C523 C524 C525 C526 C527 C528 C529 C530 C531 R500 R501 R502 R503 R504 R505 R506 R507 R508 R509 R510 R511 R512 R513 R514 R515 R516 R517 R518 R519 R520 R521 R522 R523 R524 R525 R526
component class U_eeprom: C400 R400 R401 U400
component class U_connectors: J300 J301 J302 J303 J304 J305 J306 J307 J308 J309 J311 J312
component class U_analog_in_bank0: C200_1 C201_1 C202_1 C203_1 C204_1 C205_1 C206_1 C207_1 C208_1 C209_1 C210_1 C211_1 C212_1 C213_1 C214_1 C215_1 C216_1 C217_1 C218_1 C219_1 C220_1 C221_1 R200_1 R201_1 R202_1 R203_1 R204_1 R205_1 R206_1 R207_1 R208_1 R209_1 R210_1 R211_1 R212_1 R213_1 R214_1 R215_1 R216_1 R217_1 R218_1 R219_1 R220_1 R221_1 R222_1 R223_1 R224_1 R225_1 R226_1 R227_1 R228_1 R229_1 R230_1 R231_1 R232_1 U200_1 U201_1 U202_1
differential pair TPL_L.: +TPL_L._P -TPL_L._N
differential pair TPL_H.: +TPL_H._P -TPL_H._N
differential pair RXTXL: +RXTXL_P -RXTXL_N
differential pair RXTXH: +RXTXH_P -RXTXH_N

## Components (designator, comment, footprint, x,y, rotation, side; value= is the part's Value field where it differs from the comment)
3.3V_DCDC "Testpoint_Square" Testpoint_S1 5600,2025 r90 top
3.3V_LDO "Testpoint_Square" Testpoint_S1 2214.17,2490.43 r90 top
ALARM_IN "Testpoint_Square" Testpoint_S1 5725,1772.24 r90 top
ALARM_OUT "Testpoint_Square" Testpoint_S1 4475,1437.5 r90 top
C200_1 "1u/35V" CAPC1608X08N 1478.54,925 r180 top (schematic designator C200)
C200_2 "1u/35V" CAPC1608X08N 328.54,925 r180 top (schematic designator C200)
C201_1 "100n/100V" CAPC1608X08N 1478.54,862.5 r180 top (schematic designator C201)
C201_2 "100n/100V" CAPC1608X08N 328.54,862.5 r180 top (schematic designator C201)
C202_1 "10n/100V" CAPC1608X08N 1550,775 r270 top (schematic designator C202)
C202_2 "10n/100V" CAPC1608X08N 400,775 r270 top (schematic designator C202)
C203_1 "1u/35V" CAPC1608X08N 1900,1625 r180 top (schematic designator C203)
C203_2 "1u/35V" CAPC1608X08N 750,1625 r180 top (schematic designator C203)
C204_1 "10n/100V" CAPC1608X08N 2462.99,1100 r270 top (schematic designator C204)
C204_2 "10n/100V" CAPC1608X08N 1312.99,1100 r270 top (schematic designator C204)
C205_1 "10n/100V" CAPC1608X08N 2345,1100 r270 top (schematic designator C205)
C205_2 "10n/100V" CAPC1608X08N 1195,1100 r270 top (schematic designator C205)
C206_1 "10n/100V" CAPC1608X08N 2227.01,1100 r270 top (schematic designator C206)
C206_2 "10n/100V" CAPC1608X08N 1077.01,1100 r270 top (schematic designator C206)
C207_1 "10n/100V" CAPC1608X08N 2109.02,1100 r270 top (schematic designator C207)
C207_2 "10n/100V" CAPC1608X08N 959.02,1100 r270 top (schematic designator C207)
C208_1 "10n/100V" CAPC1608X08N 1990.98,1100 r270 top (schematic designator C208)
C208_2 "10n/100V" CAPC1608X08N 840.98,1100 r270 top (schematic designator C208)
C209_1 "10n/100V" CAPC1608X08N 1872.99,1100 r270 top (schematic designator C209)
C209_2 "10n/100V" CAPC1608X08N 722.99,1100 r270 top (schematic designator C209)
C210_1 "10n/100V" CAPC1608X08N 1755,1100 r270 top (schematic designator C210)
C210_2 "10n/100V" CAPC1608X08N 605,1100 r270 top (schematic designator C210)
C211_1 "10n/100V" CAPC1608X08N 1637.01,1100 r270 top (schematic designator C211)
C211_2 "10n/100V" CAPC1608X08N 487.01,1100 r270 top (schematic designator C211)
C212_1 "100n/100V" CAPC1608X08N 2462.99,1350 r270 top (schematic designator C212)
C212_2 "100n/100V" CAPC1608X08N 1312.99,1350 r270 top (schematic designator C212)
C213_1 "100n/100V" CAPC1608X08N 2345,1350 r270 top (schematic designator C213)
C213_2 "100n/100V" CAPC1608X08N 1195,1350 r270 top (schematic designator C213)
C214_1 "100n/100V" CAPC1608X08N 2225,1350 r270 top (schematic designator C214)
C214_2 "100n/100V" CAPC1608X08N 1075,1350 r270 top (schematic designator C214)
C215_1 "100n/100V" CAPC1608X08N 2109.02,1350 r270 top (schematic designator C215)
C215_2 "100n/100V" CAPC1608X08N 959.02,1350 r270 top (schematic designator C215)
C216_1 "100n/100V" CAPC1608X08N 1990.98,1350 r270 top (schematic designator C216)
C216_2 "100n/100V" CAPC1608X08N 840.98,1350 r270 top (schematic designator C216)
C217_1 "100n/100V" CAPC1608X08N 1872.99,1350 r270 top (schematic designator C217)
C217_2 "100n/100V" CAPC1608X08N 722.99,1350 r270 top (schematic designator C217)
C218_1 "100n/100V" CAPC1608X08N 1755,1350 r270 top (schematic designator C218)
C218_2 "100n/100V" CAPC1608X08N 605,1350 r270 top (schematic designator C218)
C219_1 "100n/100V" CAPC1608X08N 1637.01,1350 r270 top (schematic designator C219)
C219_2 "100n/100V" CAPC1608X08N 487.01,1350 r270 top (schematic designator C219)
C220_1 "1u/35V" CAPC1608X08N 2302.76,1650 r90 top (schematic designator C220)
C220_2 "1u/35V" CAPC1608X08N 1152.76,1650 r90 top (schematic designator C220)
C221_1 "100n/100V" CAPC1608X08N 2422.64,1625 r0 top (schematic designator C221)
C221_2 "100n/100V" CAPC1608X08N 1272.64,1625 r0 top (schematic designator C221)
C400 "100n/100V" CAPC1608X08N 2275,2325 r0 top
C500 "47n/100V" CAPC1608X08N 2725,1100 r90 top
C501 "47n/100V" CAPC1608X08N 2725,1350 r270 top
C502 "47n/100V" CAPC1608X08N 3525,1100 r90 top
C503 "47n/100V" CAPC1608X08N 3525,1350 r270 top
C504 "47n/100V" CAPC1608X08N 2825,1100 r90 top
C505 "47n/100V" CAPC1608X08N 2825,1350 r270 top
C506 "47n/100V" CAPC1608X08N 3625,1100 r90 top
C507 "47n/100V" CAPC1608X08N 3625,1350 r270 top
C508 "47n/100V" CAPC1608X08N 2925,1100 r90 top
C509 "47n/100V" CAPC1608X08N 2925,1350 r270 top
C510 "47n/100V" CAPC1608X08N 3725,1100 r90 top
C511 "47n/100V" CAPC1608X08N 3725,1350 r270 top
C512 "47n/100V" CAPC1608X08N 3025,1100 r90 top
C513 "47n/100V" CAPC1608X08N 3025,1350 r270 top
C514 "47n/100V" CAPC1608X08N 3825,1100 r90 top
C515 "47n/100V" CAPC1608X08N 3825,1350 r270 top
C516 "47n/100V" CAPC1608X08N 3125,1100 r90 top
C517 "47n/100V" CAPC1608X08N 3125,1350 r270 top
C518 "47n/100V" CAPC1608X08N 3925,1100 r90 top
C519 "47n/100V" CAPC1608X08N 3925,1350 r270 top
C520 "47n/100V" CAPC1608X08N 3225,1100 r90 top
C521 "47n/100V" CAPC1608X08N 3225,1350 r270 top
C522 "47n/100V" CAPC1608X08N 4025,1100 r90 top
C523 "47n/100V" CAPC1608X08N 4025,1350 r270 top
C524 "47n/100V" CAPC1608X08N 3325,1100 r90 top
C525 "47n/100V" CAPC1608X08N 3325,1350 r270 top
C526 "47n/100V" CAPC1608X08N 4125,1100 r90 top
C527 "47n/100V" CAPC1608X08N 4125,1350 r270 top
C528 "47n/100V" CAPC1608X08N 3425,1100 r90 top
C529 "47n/100V" CAPC1608X08N 3425,1350 r270 top
C530 "47n/100V" CAPC1608X08N 3812.5,775 r270 top
C531 "47n/100V" CAPC1608X08N 3950,774.02 r90 top
C600 "47n/100V" CAPC1608X08N 2712.5,1539.17 r270 top
C601 "100n/100V" CAPC1608X08N 3037.5,1539.17 r270 top
C602 "220p/50V" CAPC1608X08N 5539.69,1575 r180 top
C603 "100n/100V" CAPC1608X08N 2725,1771.75 r90 top
C604 "100n/100V" CAPC1608X08N 2800,1771.75 r90 top
C605 "100n/100V" CAPC1608X08N 2875,1771.75 r90 top
C606 "100n/100V" CAPC1608X08N 2950,1771.75 r90 top
C607 "10n/100V" CAPC1608X08N 5432.15,1700 r270 top
C608 "220p/50V" CAPC1608X08N 5324.61,1575 r180 top
C609 "220p/50V" CAPC1608X08N 4914.69,1575 r180 top
C610 "10n/100V" CAPC1608X08N 4807.15,1700 r270 top
C611 "470n/50V" CAPC1608X08N 3125,2372.05 r270 top
C612 "220p/50V" CAPC1608X08N 4699.61,1575 r180 top
C613 "100n/100V" CAPC1608X08N 3025,1771.75 r90 top
C614 "22p/50V" CAPC1005X06N 4425,600 r180 top
C615 "22p/50V" CAPC1005X06N 4425,1250 r0 top
C616 "22p/50V" CAPC1005X06N 6083.66,837.5 r0 top
C617 "100n/100V" CAPC1608X08N 6050,1587.5 r270 top
C618 "22p/50V" CAPC1005X06N 5995.08,1675 r180 top
C700 "47n/100V" CAPC1608X08N 1512.5,3125 r0 top
C701 "47n/100V" CAPC1608X08N 1812.5,3125 r180 top
C702 "47n/100V" CAPC1608X08N 4762.5,3125 r180 top
C703 "47n/100V" CAPC1608X08N 4462.5,3125 r0 top
C800 "15u/100V" CAPC6153X67N 4837.5,2562.5 r180 top
C801 "15u/100V" CAPC6153X67N 4837.5,2325 r180 top
C802 "1u/100V" CAPC3225X25N 5505.12,2487.5 r180 top
C803 "1u/100V" CAPC3225X25N 5500,2362.5 r180 top
C804 "3u3/100V" CAPC4532X16N 5562.5,2712.5 r180 top
C805 "2n2/100V" CAPC1005X06N 5337.5,2246.26 r270 top
C806 "2u2/100V" CAPC3225X25N 5500,2237.5 r180 top
C807 "100n/100V" CAPC1608X08N 5485.24,2125 r180 top
C808 "2n2/100V" CAPC1005X06N 5000,2159.84 r270 top
C809 "100p/200V" CAPC1005X06N 5062.5,2197.64 r270 top
C810 "22u/6.3V" CAPC3216X18N 4912.5,2000 r0 top
C850 "100n/100V" CAPC1608X08N 2062.5,2946.46 r270 top
C851 "2u2/10V" CAPC2012X14N 2025,2587.5 r90 top
C852 "100n/100V" CAPC1608X08N 2165.75,2962.5 r180 top
C900 "100n/100V" CAPC1608X08N 1496.46,2490.75 r0 top
C920 "100n/100V" CAPC1608X08N 275,2725 r90 top
C921 "100n/100V" CAPC1608X08N 275,2850 r270 top
C922 "100n/100V" CAPC1608X08N 600,2875 r180 top
C923 "100n/100V" CAPC1608X08N 600,2512.5 r90 top
C924 "100n/100V" CAPC1608X08N 550,2375 r180 top
C925 "100n/100V" CAPC1608X08N 525,2975 r270 top
D600 "DFLS1100Q-7" PowerDI123 2637.5,1535.04 r270 top
D601 "DFLS1100Q-7" PowerDI123 3725,1575 r0 top
D602 "PTVS60VS1UR" NEXPERIA_PTVSxS1UR 2962.5,1612.5 r90 top
D603 "S1MSP1-7" S1MSP1 2837.5,1637.5 r0 top
D604 "PESD5V0V1BB" SOD523_PESD_NEXPERIA 5511.15,1687.5 r90 top
D605 "PESD5V0V1BB" SOD523_PESD_NEXPERIA 5353.15,1687.5 r90 top
D606 "PESD5V0V1BB" SOD523_PESD_NEXPERIA 4886.15,1687.5 r90 top
D607 "PESD5V0V1BB" SOD523_PESD_NEXPERIA 4728.15,1687.5 r90 top
D608 "DFLS1100Q-7" PowerDI123 4275,761.02 r90 top
D609 "PACDN042Y3R" ON-SEMI-SOT-23-3-CASE-318-08 4425,875 r270 top
D610 "PACDN042Y3R" ON-SEMI-SOT-23-3-CASE-318-08 5925,700 r270 top
enable_DCDC "Testpoint_Square" Testpoint_S1 4765.06,1987.5 r90 top
FD_LL "Comment" Fiducial_2 196.85,590.55 r0 top locked
FD_LR "Comment" Fiducial_2 6102.36,590.55 r0 top locked
FD_UR "Comment" Fiducial_2 6102.36,3011.81 r0 top locked
GND "Testpoint_Square" Testpoint_S1 4025,675 r90 top
IC920 "MCP9800A0T-M/OT" SOT-23-OT5_L 400,2962.5 r180 top
J300 "WR-MPC4 64901821122" 64901821122 3550,-312.5 r180 top (schematic designator j300)
J301 "WR-MPC4 64900221122" 64900221122 5350,200 r180 top
J302 "WR-MPC4 64900221122" 64900221122 4975,200 r180 top
J303 "gen_pinheader_2.54_2x9" Pinheader_2.54_2x9 1425,2750 r0 top
J304 "WR-MPC4 64901621122" 64901621122 2000,-300 r180 top
J305 "WR-MPC4 64900221122" 64900221122 5725,200 r180 top
J306 "WR-MPC4 64900221122" 64900221122 4600,200 r180 top
J307 "WR-MPC4 64901621122" 64901621122 550,-300 r180 top
J308 "gen_pinheader_2.54_2x7" Pinheader_2.54_2x7 4525,2375 r90 top
J309 "gen_pinheader_2.54_2x7" Pinheader_2.54_2x7 6012.5,2375 r90 top
J311 "gen_pinheader_2.54_2" Pinheader_2.54_2 4300,2625 r90 top
J312 "gen_pinheader_2.54_2" Pinheader_2.54_2 5787.5,2625 r90 top
L800 "470nH" SRP7028A 5200,2637.5 r0 top
L801 "47µH" TYS6045470M-10 5187.5,2025 r180 top
LD600 "green" LEDC1608X07N 2925,2850 r90 top
LD601 "green" LEDC1608X07N 2575,600 r180 top
LD800 "green" LEDC1608X07N 5600,2075 r180 top
LD850 "green" LEDC1608X07N 2287.5,2612.5 r180 top
MP_LL "Hole_3.2_Iso" Hole_3.2_Iso 196.85,196.85 r0 top locked
MP_LR "Hole_3.2_Iso" Hole_3.2_Iso 6102.36,196.85 r0 top locked
MP_UL "Hole_3.2_Iso" Hole_3.2_Iso 196.85,3740.16 r0 top locked
MP_UR "Hole_3.2_Iso" Hole_3.2_Iso 6102.36,3740.16 r0 top locked
Q600 "MJD31CAJ" NEXPERIA_DPAK_SOT428C 3412.01,2597.34 r0 top
Q601 "DMN10H220L-7" SOT95P237X110-3N 4425,1050 r270 top
Q602 "DMN10H220L-7" SOT95P237X110-3N 5850,1652.46 r180 top
R100 "0R" RESC1608X05N 1475,1652.56 r270 top
R200_1 "0R" RESC1608X05N 2550,775 r270 top (schematic designator R200)
R200_2 "0R" RESC1608X05N 1400,775 r90 top (schematic designator R200)
R201_1 "0R" RESC1608X05N 1637.01,1837.5 r90 top (schematic designator R201)
R201_2 "0R" RESC1608X05N 487.01,1837.5 r90 top (schematic designator R201)
R202_1 "0R" RESC1608X05N 1755,1837.5 r90 top (schematic designator R202)
R202_2 "0R" RESC1608X05N 605,1837.5 r90 top (schematic designator R202)
R203_1 "0R" RESC1608X05N 1755,887.5 r90 top (schematic designator R203)
R203_2 "0R" RESC1608X05N 605,887.5 r90 top (schematic designator R203)
R204_1 "0R" RESC1608X05N 1637.01,1687.5 r90 top (schematic designator R204)
R204_2 "0R" RESC1608X05N 487.01,1687.5 r90 top (schematic designator R204)
R205_1 "0R" RESC1608X05N 1755,1687.5 r90 top (schematic designator R205)
R205_2 "0R" RESC1608X05N 605,1687.5 r90 top (schematic designator R205)
R206_1 "10k" RESC1608X05N 1637.01,775 r270 top (schematic designator R206)
R206_2 "10k" RESC1608X05N 487.01,775 r270 top (schematic designator R206)
R207_1 "10k" RESC1608X05N 1872.99,775 r270 top (schematic designator R207)
R207_2 "10k" RESC1608X05N 722.99,775 r270 top (schematic designator R207)
R208_1 "10k" RESC1608X05N 2109.02,775 r270 top (schematic designator R208)
R208_2 "10k" RESC1608X05N 959.02,775 r270 top (schematic designator R208)
R209_1 "10k" RESC1608X05N 2345,775 r270 top (schematic designator R209)
R209_2 "10k" RESC1608X05N 1195,775 r270 top (schematic designator R209)
R210_1 "0R" RESC1608X05N 2462.99,1512.5 r90 top (schematic designator R210)
R210_2 "0R" RESC1608X05N 1312.99,1512.5 r90 top (schematic designator R210)
R211_1 "0R" RESC1608X05N 2345,1512.5 r90 top (schematic designator R211)
R211_2 "0R" RESC1608X05N 1195,1512.5 r90 top (schematic designator R211)
R212_1 "0R" RESC1608X05N 2225,1512.5 r90 top (schematic designator R212)
R212_2 "0R" RESC1608X05N 1075,1512.5 r90 top (schematic designator R212)
R213_1 "0R" RESC1608X05N 2109.02,1512.5 r90 top (schematic designator R213)
R213_2 "0R" RESC1608X05N 959.02,1512.5 r90 top (schematic designator R213)
R214_1 "0R" RESC1608X05N 1990.98,1512.5 r90 top (schematic designator R214)
R214_2 "0R" RESC1608X05N 840.98,1512.5 r90 top (schematic designator R214)
R215_1 "0R" RESC1608X05N 1872.99,1512.5 r90 top (schematic designator R215)
R215_2 "0R" RESC1608X05N 722.99,1512.5 r90 top (schematic designator R215)
R216_1 "0R" RESC1608X05N 1755,1512.5 r90 top (schematic designator R216)
R216_2 "0R" RESC1608X05N 605,1512.5 r90 top (schematic designator R216)
R217_1 "0R" RESC1608X05N 1637.01,1512.5 r90 top (schematic designator R217)
R217_2 "0R" RESC1608X05N 487.01,1512.5 r90 top (schematic designator R217)
R218_1 "10k" RESC1608X05N 1755,775 r270 top (schematic designator R218)
R218_2 "10k" RESC1608X05N 605,775 r270 top (schematic designator R218)
R219_1 "10k" RESC1608X05N 1990.98,775 r270 top (schematic designator R219)
R219_2 "10k" RESC1608X05N 840.98,775 r270 top (schematic designator R219)
R220_1 "10k" RESC1608X05N 2227.01,775 r270 top (schematic designator R220)
R220_2 "10k" RESC1608X05N 1077.01,775 r270 top (schematic designator R220)
R221_1 "10k" RESC1608X05N 2462.99,775 r270 top (schematic designator R221)
R221_2 "10k" RESC1608X05N 1312.99,775 r270 top (schematic designator R221)
R222_1 "1k" RESC1608X05N 2462.99,1225 r270 top (schematic designator R222)
R222_2 "1k" RESC1608X05N 1312.99,1225 r270 top (schematic designator R222)
R223_1 "1k" RESC1608X05N 2345,1225 r270 top (schematic designator R223)
R223_2 "1k" RESC1608X05N 1195,1225 r270 top (schematic designator R223)
R224_1 "1k" RESC1608X05N 2225,1225 r270 top (schematic designator R224)
R224_2 "1k" RESC1608X05N 1075,1225 r270 top (schematic designator R224)
R225_1 "1k" RESC1608X05N 2109.02,1225 r270 top (schematic designator R225)
R225_2 "1k" RESC1608X05N 959.02,1225 r270 top (schematic designator R225)
R226_1 "1k" RESC1608X05N 1990.98,1225 r270 top (schematic designator R226)
R226_2 "1k" RESC1608X05N 840.98,1225 r270 top (schematic designator R226)
R227_1 "1k" RESC1608X05N 1872.99,1225 r270 top (schematic designator R227)
R227_2 "1k" RESC1608X05N 722.99,1225 r270 top (schematic designator R227)
R228_1 "1k" RESC1608X05N 1755,1225 r270 top (schematic designator R228)
R228_2 "1k" RESC1608X05N 605,1225 r270 top (schematic designator R228)
R229_1 "1k" RESC1608X05N 1637.01,1225 r270 top (schematic designator R229)
R229_2 "1k" RESC1608X05N 487.01,1225 r270 top (schematic designator R229)
R230_1 "0R" RESC1608X05N 2487.5,1900 r0 top (schematic designator R230)
R230_2 "0R" RESC1608X05N 1337.5,1900 r0 top (schematic designator R230)
R231_1 "1k" RESC1608X05N 2525,1652.56 r270 top (schematic designator R231)
R231_2 "1k" RESC1608X05N 1375,1652.56 r270 top (schematic designator R231)
R232_1 "0R" RESC1608X05N 2330.31,1900 r180 top (schematic designator R232)
R232_2 "0R" RESC1608X05N 1180.31,1900 r180 top (schematic designator R232)
R400 "5k1" RESC1608X05N 2475,2200 r0 top
R401 "5k1" RESC1608X05N 2075,2150 r180 top
R500 "10k" RESC1608X05N 2725,1225 r270 top
R501 "10k" RESC1608X05N 3525,1225 r270 top
R502 "10k" RESC1608X05N 2825,1225 r270 top
R503 "10k" RESC1608X05N 3625,1225 r270 top
R504 "10k" RESC1608X05N 2925,1225 r270 top
R505 "10k" RESC1608X05N 3725,1225 r270 top
R506 "10k" RESC1608X05N 3025,1225 r270 top
R507 "10k" RESC1608X05N 3825,1225 r270 top
R508 "10k" RESC1608X05N 3125,1225 r270 top
R509 "10k" RESC1608X05N 3925,1225 r270 top
R510 "10k" RESC1608X05N 3225,1225 r270 top
R511 "10k" RESC1608X05N 4025,1225 r270 top
R512 "10k" RESC1608X05N 3325,1225 r270 top
R513 "10k" RESC1608X05N 4125,1225 r270 top
R514 "10k" RESC1608X05N 3425,1225 r270 top
R515 "10k" RESC1608X05N 3875,775 r270 top
R516 "0R" RESC1608X05N 3725,775 r270 top
R517 "0R" RESC1608X05N 3625,775 r270 top
R518 "0R" RESC1608X05N 3525,775 r270 top
R519 "0R" RESC1608X05N 3425,775 r270 top
R520 "0R" RESC1608X05N 3325,775 r270 top
R521 "0R" RESC1608X05N 3225,775 r270 top
R522 "0R" RESC1608X05N 3125,775 r270 top
R523 "0R" RESC1608X05N 3025,775 r270 top
R524 "0R" RESC1608X05N 2925,775 r270 top
R525 "0R" RESC1608X05N 2825,775 r270 top
R526 "0R" RESC1608X05N 2725,775 r270 top
R600 "10R" RESC2012X05N 2812.5,1510.63 r180 top
R601 "0R" RESC1608X05N 3403.13,2375 r0 top
R602 "0R" RESC1608X05N 3025,2925 r0 top
R603 "0R" RESC1608X05N 2575,537.5 r0 top
R604 "270R" RESC1608X05N 3025,2775 r180 top
R605 "2k7" RESC1608X05N 2675,572.44 r90 top
R606 "0R" RESC1608X05N 2737.5,2400 r0 top
R607 "0R" RESC1608X05N 2737.5,2462.5 r0 top
R608 "0R" RESC1608X05N 2737.5,2525 r0 top
R609 "0R" RESC1608X05N 2737.5,2587.5 r0 top
R610 "0R" RESC1608X05N 5511.15,850 r270 top
R611 "150R" RESC1608X05N 5432.15,1602.56 r270 top
R612 "0R" RESC1608X05N 5353.15,850 r270 top
R613 "0R" RESC1608X05N 2737.5,2775 r0 top
R614 "0R" RESC1608X05N 2737.5,2837.5 r0 top
R615 "0R" RESC1608X05N 2737.5,2650 r0 top
R616 "5k1" RESC1608X05N 2375,2600 r270 top
R617 "5k1" RESC1608X05N 2375,2762.5 r90 top
R618 "13R7" RESC1608X05N 3212.5,2371.06 r90 top
R619 "0R" RESC1608X05N 4886.15,850 r270 top
R620 "0R" RESC1608X05N 2737.5,2712.5 r0 top
R621 "150R" RESC1608X05N 4807.15,1602.56 r270 top
R622 "0R" RESC1608X05N 4800,812.5 r315 top
R623 "0R" RESC1608X05N 2900,2000 r180 top
R624 "0R" RESC1608X05N 2900,2062.5 r180 top
R625 "0R" RESC1608X05N 2900,2250 r180 top
R626 "0R" RESC1608X05N 2900,2312.5 r180 top
R627 "5k1" RESC1608X05N 2900,1862.5 r0 top
R628 "150R" RESC1608X05N 4375,700 r270 top
R629 "0R" RESC1608X05N 2737.5,1875 r0 top
R630 "0R" RESC1608X05N 2737.5,1937.5 r0 top
R631 "0R" RESC1608X05N 2737.5,2000 r0 top
R632 "150R" RESC1608X05N 4475,700 r270 top
R633 "0R" RESC1608X05N 2737.5,2062.5 r0 top
R634 "150R" RESC1608X05N 4475,1350 r270 top
R635 "0R" RESC1608X05N 2737.5,2125 r0 top
R636 "0R" RESC1608X05N 2737.5,2187.5 r0 top
R637 "0R" RESC1608X05N 3403.12,2300 r180 top
R638 "100k" RESC1608X05N 4425,1175 r180 top
R639 "0R" RESC1608X05N 2737.5,2250 r0 top
R640 "0R" RESC1608X05N 2737.5,2312.5 r0 top
R641 "5k1" RESC1608X05N 5725,1624.9 r90 top
R642 "150R" RESC1608X05N 5975,1587.5 r90 top
R643 "100k" RESC1608X05N 6002.56,1725 r0 top
R700 "10k" RESC1608X05N 1662.5,3050 r0 top
R701 "10k" RESC1608X05N 4612.5,3050 r180 top
R702 "10k" RESC1608X05N 1662.5,3125 r180 top
R703 "10k" RESC1608X05N 4612.5,3125 r0 top
R704 "10k NTC" RESC1005X04N 1587.5,3187.5 r90 top
R705 "10k NTC" RESC1005X04N 4687.5,3187.5 r90 top
R706 "ThermaWick" Vishay_THJP_0603 5862.5,3250 r270 top
R707 "ThermaWick" Vishay_THJP_0603 5087.5,3250 r270 top
R708 "ThermaWick" Vishay_THJP_0603 4312.5,3250 r270 top
R709 "ThermaWick" Vishay_THJP_0603 3537.5,3251.57 r270 top
R710 "ThermaWick" Vishay_THJP_0603 2762.5,3250 r270 top
R711 "ThermaWick" Vishay_THJP_0603 1987.5,3250 r270 top
R712 "ThermaWick" Vishay_THJP_0603 1212.5,3250 r270 top
R713 "ThermaWick" Vishay_THJP_0603 437.5,3250 r270 top
R714 "68R" RESC5025X07N 5675,3400 r0 top
R715 "68R" RESC5025X07N 5275,3750 r0 top
R716 "68R" RESC5025X07N 4900,3400 r0 top
R717 "68R" RESC5025X07N 4500,3750 r0 top
R718 "68R" RESC5025X07N 4125,3750 r0 top
R719 "68R" RESC5025X07N 3725,3750 r0 top
R720 "68R" RESC5025X07N 3350,3400 r0 top
R721 "68R" RESC5025X07N 2950,3400 r0 top
R722 "68R" RESC5025X07N 2575,3400 r0 top
R723 "68R" RESC5025X07N 2175,3400 r0 top
R724 "68R" RESC5025X07N 1800,3750 r0 top
R725 "68R" RESC5025X07N 1400,3400 r0 top
R726 "68R" RESC5025X07N 1025,3400 r0 top
R727 "68R" RESC5025X07N 625,3400 r180 top
R728 "68R" RESC5025X07N 5675,3750 r0 top
R729 "68R" RESC5025X07N 5275,3400 r0 top
R730 "68R" RESC5025X07N 4900,3750 r0 top
R731 "68R" RESC5025X07N 4500,3400 r0 top
R732 "68R" RESC5025X07N 4125,3400 r0 top
R733 "68R" RESC5025X07N 3725,3400 r0 top
R734 "68R" RESC5025X07N 3350,3750 r0 top
R735 "68R" RESC5025X07N 2950,3750 r0 top
R736 "68R" RESC5025X07N 2575,3750 r0 top
R737 "68R" RESC5025X07N 2175,3750 r0 top
R738 "68R" RESC5025X07N 1800,3400 r0 top
R739 "68R" RESC5025X07N 1400,3750 r0 top
R740 "68R" RESC5025X07N 1025,3750 r0 top
R741 "68R" RESC5025X07N 625,3750 r180 top
R800 "100R" RESC1608X05N 4712.5,2737.5 r270 top
R801 "0R" RESC1608X05N 5512.5,2037.5 r270 top
R802 "0R1" RESC2012X05N 5475,2587.5 r180 top
R803 "0R" RESC1608X05N 5200,2812.5 r0 top
R804 "240R" RESC1608X05N 5687.5,2037.5 r90 top
R805 "287k" RESC1608X05N 5387.5,2100 r90 top
R806 "174k" RESC1608X05N 4925,2112.5 r90 top
R807 "0R" RESC1608X05N 4737.5,2150 r0 top
R808 "100k" RESC1608X05N 4862.5,2112.5 r270 top
R809 "27k4" RESC1608X05N 5050,2342.22 r90 top
R810 "10k" RESC1608X05N 4737.5,2087.5 r180 top
R850 "0R" RESC1608X05N 2135.24,2539.79 r0 top
R851 "0R" RESC1608X05N 2262.5,2822.54 r270 top
R852 "1M" RESC1608X05N 2135.24,2600 r180 top
R853 "0R" RESC1608X05N 2287.5,2550 r0 top
R854 "240R" RESC1608X05N 2287.5,2675 r0 top
R900 "100k" RESC1608X05N 1067.42,2465.75 r0 top
R901 "100k" RESC1608X05N 1067.42,2278.25 r0 top
R902 "100k" RESC1608X05N 1067.42,2090.75 r0 top
R903 "100k" RESC1608X05N 1742.42,2228.25 r180 top
R904 "100k" RESC1608X05N 1742.42,2415.75 r180 top
R905 "100k" RESC1608X05N 1067.42,2403.25 r0 top
R906 "100k" RESC1608X05N 1067.42,2215.75 r0 top
R907 "100k" RESC1608X05N 1742.42,2103.25 r180 top
R908 "100k" RESC1608X05N 1742.42,2290.75 r180 top
R909 "100k" RESC1608X05N 1742.42,2478.25 r180 top
R910 "100k" RESC1608X05N 1067.42,2528.25 r0 top
R911 "100k" RESC1608X05N 1067.42,2340.75 r0 top
R912 "100k" RESC1608X05N 1067.42,2153.25 r0 top
R913 "100k" RESC1608X05N 1742.42,2165.75 r180 top
R914 "100k" RESC1608X05N 1742.42,2353.25 r180 top
R915 "100k" RESC1608X05N 1742.42,2540.75 r180 top
R916 "10k" RESC1608X05N 1312.4,2490.75 r180 top
R917 "100k" RESC1608X05N 904.92,2528.25 r0 top
R918 "100k" RESC1608X05N 904.92,2340.75 r0 top
R919 "100k" RESC1608X05N 904.92,2153.25 r0 top
R920 "10k" RESC1608X05N 600,2975 r270 top
R921 "100k" RESC1608X05N 1904.92,2165.75 r180 top
R922 "100k" RESC1608X05N 1904.92,2353.25 r180 top
R923 "100k" RESC1608X05N 1904.92,2540.75 r180 top
R924 "100k" RESC1608X05N 904.92,2465.75 r0 top
R925 "100k" RESC1608X05N 904.92,2278.25 r0 top
R926 "100k" RESC1608X05N 904.92,2090.75 r0 top
R927 "100k" RESC1608X05N 1904.92,2228.25 r180 top
R928 "100k" RESC1608X05N 1904.92,2415.75 r180 top
R929 "100k" RESC1608X05N 904.92,2403.25 r0 top
R930 "100k" RESC1608X05N 904.92,2215.75 r0 top
R931 "100k" RESC1608X05N 1904.92,2103.25 r180 top
R932 "100k" RESC1608X05N 1904.92,2290.75 r180 top
R933 "100k" RESC1608X05N 1904.92,2478.25 r180 top
T600 "HM2102NLT" HM2102NL 5550,1225 r90 top
T601 "HM2102NLT" HM2102NL 4925,1225 r90 top
TPL_H_N "Testpoint_Square" Testpoint_S1 5285.1,1772.24 r90 top
TPL_H_P "Testpoint_Square" Testpoint_S1 5579.2,1772.24 r90 top
TPL_L_N "Testpoint_Square" Testpoint_S1 4660.1,1772.24 r90 top
TPL_L_P "Testpoint_Square" Testpoint_S1 4954.2,1772.24 r90 top
U200_1 "ADR4540BRZ" SOIC127P600X175-8N 1475,1100 r90 top (schematic designator U200)
U200_2 "ADR4540BRZ" SOIC127P600X175-8N 325,1100 r90 top (schematic designator U200)
U201_1 "ADG728BRUZ" ADI-RU-16_M 2050,1775 r180 top (schematic designator U201)
U201_2 "ADG728BRUZ" ADI-RU-16_M 900,1775 r180 top (schematic designator U201)
U202_1 "AD8628ARTZ-R2" ADI-RJ-5_M 2350,1787.5 r180 top (schematic designator U202)
U202_2 "AD8628ARTZ-R2" ADI-RJ-5_M 1200,1787.5 r180 top (schematic designator U202)
U400 "M24M02-DWMN3TP/K" SOIC127P600X175-8N 2275,2175 r0 top
U600 "MC33775A" NXP_SOT1510-2 3382.97,1888.88 r90 top
U601 "ACFL-6211T-000E" Broadcom_ACFL-6211T 6025,1150 r270 top
U800 "LM5163-Q1" R-PDSO-G8 5200,2325 r270 top
U850 "TPS7A1633AQDGNRQ1" TPS7A16A-Q1 2150,2762.5 r90 top
U851 "TPS7A1633DRBR" TPS7A16_VSON 2000.89,2762.5 r90 top
U900 "TCA9539PWR" PW0024A_M 1404.92,2265.75 r0 top
U920 "BME280" BOSC-BME280-8_V 400,2775 r0 top
U921 "SHT35-DIS-F" SHT3X 600,2775 r180 top
U922 "BME680" BME680 475,2512.5 r0 top
Vaux "Testpoint_Square" Testpoint_S1 2575,650 r90 top
Vbat "Testpoint_Square" Testpoint_S1 3150,1510.63 r90 top
Vbat_con_ext "Testpoint_Square" Testpoint_S1 3150,1575 r90 top
Vddc "Testpoint_Square" Testpoint_S1 3000,2850 r90 top
Vin_DCDC "Testpoint_Square" Testpoint_S1 4975,2775 r90 top
Vmodule "Testpoint_Square" Testpoint_S1 4025,802.56 r90 top

## Footprints (in the part's own frame and the unit in brackets; to place one, negate y for a bottom-side part, rotate by r counter-clockwise, add the part's x,y. Pads: shape width x height; smd on the part's side, far side on the other; paste and mask are expansions set on the pad)
64900221122 [mm] "4.20mm Male Dual Row Vertical Header, 2p"
  rrect50% 2.1x2.1 hole 1.4: 1(0,-2.75)
  round 2.1 hole 1.4: 2(0,2.75)
  silkscreen extent -2.85,-4.9 2.85,6.4, body extent -2.7,-4.8 3.1,6.3, height 12.85
64901621122 [mm] "4.20mm Male Dual Row Vertical Header, 16p"
  rrect50% 2.1x2.1 hole 1.4: 1(14.7,-2.75)
  round 2.1 hole 1.4: 2(10.5,-2.75) 3(6.3,-2.75) 4(2.1,-2.75) 5(-2.1,-2.75) 6(-6.3,-2.75) 7(-10.5,-2.75) 8(-14.7,-2.75) 9(14.7,2.75) 10(10.5,2.75) 11(6.3,2.75) 12(2.1,2.75) 13(-2.1,2.75) 14(-6.3,2.75) 15(-10.5,2.75) 16(-14.7,2.75)
  silkscreen extent -17.55,-4.9 17.55,6.4, body extent -17.45,-4.8 17.75,6.3, height 12.85
64901821122 [mm] "4.20mm Male Dual Row Vertical Header, 18p"
  rrect50% 2.1x2.1 hole 1.4: 1(16.8,-2.75)
  round 2.1 hole 1.4: 2(12.6,-2.75) 3(8.4,-2.75) 4(4.2,-2.75) 5(0,-2.75) 6(-4.2,-2.75) 7(-8.4,-2.75) 8(-12.6,-2.75) 9(-16.8,-2.75) 10(16.8,2.75) 11(12.6,2.75) 12(8.4,2.75) 13(4.2,2.75) 14(0,2.75) 15(-4.2,2.75) 16(-8.4,2.75) 17(-12.6,2.75) 18(-16.8,2.75)
  silkscreen extent -19.65,-4.9 19.65,6.4, body extent -19.55,-4.8 19.85,6.3, height 12.85
ADI-RJ-5_M [mm] "SOT-23, 5-Leads, Body 2.9x1.6mm, Pitch 0.95mm, IPC Low Density"
  rect 1.3x0.7 smd: 1(-1.2,0.95) 2(-1.2,0) 3(-1.2,-0.95) 4(1.2,-0.95) 5(1.2,0.95)
  silkscreen extent -1.33,-1.5 0.15,1.97, body extent -0.85,-1.5 0.85,1.5, height 1.45
ADI-RU-16_M [mm] "SOP, 16-Leads, Body 5x4.4mm, Pitch 0.65mm, IPC Low Density"
  oval 1.85x0.35 smd: 1(-2.925,2.275) 2(-2.925,1.625) 3(-2.925,0.975) 4(-2.925,0.325) 5(-2.925,-0.325) 6(-2.925,-0.975) 7(-2.925,-1.625) 8(-2.925,-2.275) 9(2.925,-2.275) 10(2.925,-1.625) 11(2.925,-0.975) 12(2.925,-0.325) 13(2.925,0.325) 14(2.925,0.975) 15(2.925,1.625) 16(2.925,2.275)
  silkscreen extent -3.05,-2.55 1.6,3.12, body extent -2.25,-2.55 2.25,2.55, height 1.2
BME680 [mm] "Bosch BME680"
  rect 0.4x0.4 smd: 1(1.2,-1.2) 2(0.4,-1.2) 3(-0.4,-1.2) 4(-1.2,-1.2) 5(-1.2,1.2) 6(-0.4,1.2) 7(0.4,1.2) 8(1.2,1.2)
  silkscreen extent -1.67,-1.67 1.67,1.67, body extent -1.5,-1.5 1.5,1.5, height 1.02
BOSC-BME280-8_V [mm] "SMD, 8-Leads, Body 2.5x2.5mm, Pitch 0.65mm"
  rect 0.5x0.35 smd: 1(1.025,0.975) 2(1.025,0.325) 3(1.025,-0.325) 4(1.025,-0.975) 5(-1.025,-0.975) 6(-1.025,-0.325) 7(-1.025,0.325) 8(-1.025,0.975)
  silkscreen extent -0.39,-1.25 1.73,1.25, body extent -1.25,-1.25 1.25,1.25, height 1
Broadcom_ACFL-6211T [mm] "SOP, 12-Leads, Body 5,89x7,56mm, Pitch 0,80mm, IPC Medium Density"
  oval 1.8x0.6 smd: 1(-4.775,2) 2(-4.775,1.2) 3(-4.775,0.4) 4(-4.775,-0.4) 5(-4.775,-1.2) 6(-4.775,-2) 7(4.775,-2) 8(4.775,-1.2) 9(4.775,-0.4) 10(4.775,0.4) 11(4.775,1.2) 12(4.775,2)
  silkscreen extent -4.9,-2.95 3.48,2.98, body extent -5.19,-2.95 5.19,2.95, height 3.31
CAPC1005X06N [mm] "Chip Capacitor, 2-Leads, Body 1,00x0,50mm, IPC Medium Density"
  rrect50% 0.52x0.62 smd: 1(-0.51,0) 2(0.51,0)
  body extent -0.53,-0.28 0.53,0.28, height 0.55
CAPC1608X08N [mm] "Chip Capacitor, 2-Leads, Body 1,60x0,80mm, IPC Medium Density"
  rrect50% 0.75x0.95 smd: 1(-0.725,0) 2(0.725,0)
  body extent -0.85,-0.45 0.85,0.45, height 0.8
CAPC2012X14N [mm] "Chip Capacitor, 2-Leads, Body 2,00x1,25mm, IPC Medium Density"
  rrect40% 0.9x1.45 smd: 1(-1.025,0) 2(1.025,0)
  silkscreen extent -0.2,-0.62 0.2,0.62, body extent -1.1,-0.72 1.1,0.72, height 1.45
CAPC3216X18N [mm] "Chip Capacitor, 2-Leads, Body 3,20x1,60mm, IPC Medium Density"
  rrect30% 1.35x1.8 smd: 1(-1.375,0) 2(1.375,0)
  silkscreen extent -0.3,-0.8 0.3,0.8, body extent -1.7,-0.9 1.7,0.9, height 1.8
CAPC3225X25N [mm] "Chip Capacitor, 2-Leads, Body 3,20x2,50mm, IPC Medium Density"
  rrect30% 1.3x2.7 smd: 1(-1.4,0) 2(1.4,0)
  silkscreen extent -0.35,-1.25 0.35,1.25, body extent -1.7,-1.35 1.7,1.35, height 2.5
CAPC4532X16N [mm] "Chip Capacitor, 2-Leads, Body 4,50x3,20mm, IPC Medium Density"
  rect 1.6x3.5 smd: 1(-1.95,0) 2(1.95,0)
  silkscreen extent -0.75,-1.65 0.75,1.65, body extent -2.4,-1.75 2.4,1.75, height 1.55
CAPC6153X67N [mm] "Chip Capacitor, 2-Leads, Body 6,10x5,30mm, IPC Medium Density"
  rect 2.15x5.5 smd: 1(-2.525,0) 2(2.525,0)
  silkscreen extent -1.05,-2.65 1.05,2.65, body extent -3.25,-2.75 3.25,2.75, height 6.7
Fiducial_2 [mm] "Fiducial Round 1mm"
  round 1 smd paste-0.5 mask+0.5: 0(0,0)
  Top Copper keep-out circle w0.2: c0,0 r0.9
HM2102NL [mil]
  rect 67.5x40 smd: 1(-271.65,196.85)
  rrect50% 67.5x40 smd: 2(-271.65,117.85) 3(-271.65,38.85) 4(-271.65,-40.15) 5(-271.65,-119.15) 6(-271.65,-198.15) 7(270.85,-198.15) 8(270.85,-119.15) 9(270.85,-40.15) 10(270.85,38.85) 11(270.85,117.85) 12(270.85,196.85)
  silkscreen extent -224,-300 224,299, body extent -224,-299 224,299, height 197
Hole_3.2_Iso [mm]
  round 3.2 hole 3.2 unplated: Hole_3.2_Iso(0,0)
  Keep-Out Layer circle w1: c0,0 r2.3
  silkscreen extent -2.75,-2.75 2.75,2.75
LEDC1608X07N [mm] "LED, 2-Leads, Body 1,60x0,80mm, IPC Medium Density"
  rrect50% 0.7x0.9 smd: 1(-0.7,0) 2(0.7,0)
  silkscreen extent -1.35,0.35 -1.25,0.45, body extent -0.8,-0.4 0.8,0.4, height 0.7
NEXPERIA_DPAK_SOT428C [mm] "D-PAK, 3-Pads, Body 6,21x6,73mm (max), IPC Medium Density"
  rect 2.4x1.4 smd paste-10: 1(-4.75,2.29) 3(-4.75,-2.29)
  rect 1.4x2.4 smd paste-10: 2(0,0)
  rect 5.75x5.9 smd paste-10: 4(1.675,0)
  silkscreen extent -4.87,-3.35 -1.6,3.66, body extent -5.89,-3.37 4.11,3.38, height 2.38
NEXPERIA_PTVSxS1UR [mm] "SODFL, 2-Leads, Body 1,70x3,50mm, IPC Medium Density"
  rect 1.2x1.2 smd: 1(-1.4,0) 2(1.4,0)
  silkscreen extent -1.95,0.85 -1.85,0.95, body extent -1.75,-0.95 1.75,0.95, height 1.1
NXP_SOT1510-2 [mm] "TSQFP, 64-Leads, Body 10,00x10,00mm, Pitch 0,50mm, Thermal Pad 7,00x7,00mm, IPC Medium Density"
  oval 1.5x0.27 smd: 1(-5.75,3.75) 2(-5.75,3.25) 3(-5.75,2.75) 4(-5.75,2.25) 5(-5.75,1.75) 6(-5.75,1.25) 7(-5.75,0.75) 8(-5.75,0.25) 9(-5.75,-0.25) 10(-5.75,-0.75) 11(-5.75,-1.25) 12(-5.75,-1.75) 13(-5.75,-2.25) 14(-5.75,-2.75) 15(-5.75,-3.25) 16(-5.75,-3.75) 33(5.75,-3.75) 34(5.75,-3.25) 35(5.75,-2.75) 36(5.75,-2.25) 37(5.75,-1.75) 38(5.75,-1.25) 39(5.75,-0.75) 40(5.75,-0.25) 41(5.75,0.25) 42(5.75,0.75) 43(5.75,1.25) 44(5.75,1.75) 45(5.75,2.25) 46(5.75,2.75) 47(5.75,3.25) 48(5.75,3.75)
  oval 0.27x1.5 smd: 17(-3.75,-5.75) 18(-3.25,-5.75) 19(-2.75,-5.75) 20(-2.25,-5.75) 21(-1.75,-5.75) 22(-1.25,-5.75) 23(-0.75,-5.75) 24(-0.25,-5.75) 25(0.25,-5.75) 26(0.75,-5.75) 27(1.25,-5.75) 28(1.75,-5.75) 29(2.25,-5.75) 30(2.75,-5.75) 31(3.25,-5.75) 32(3.75,-5.75) 49(3.75,5.75) 50(3.25,5.75) 51(2.75,5.75) 52(2.25,5.75) 53(1.75,5.75) 54(1.25,5.75) 55(0.75,5.75) 56(0.25,5.75) 57(-0.25,5.75) 58(-0.75,5.75) 59(-1.25,5.75) 60(-1.75,5.75) 61(-2.25,5.75) 62(-2.75,5.75) 63(-3.25,5.75) 64(-3.75,5.75)
  rect 7x7 smd: 65(0,0)
  silkscreen extent -5.87,-4.6 4.6,4.6, body extent -6,-6 6,6, height 1.6
ON-SEMI-SOT-23-3-CASE-318-08 [mm] "SOT23, 3-Leads, Body 2,92x2,37mm, Pitch 0,95mm, IPC Medium Density"
  rect 1x0.6 smd: 1(-1.2,0.95) 2(-1.2,-0.95) 3(1.2,0)
  silkscreen extent -1.32,-1.5 0.7,1.93, body extent -1.32,-1.52 1.32,1.52, height 1.11
Pinheader_2.54_2 [mm] "Pinheader, 2.54mm, gerade"
  round 1.75 hole 1: 1(-1.27,0) 2(1.27,0)
  silkscreen extent -2.47,-1.2 2.47,1.2, body extent -2.54,-1.27 2.54,1.27, height 8.74
Pinheader_2.54_2x7 [mm] "Pinheader, 2.54mm, gerade, 2-reihig"
  round 1.75 hole 1: 1(-7.62,-1.27) 2(-7.62,1.27) 3(-5.08,-1.27) 4(-5.08,1.27) 5(-2.54,-1.27) 6(-2.54,1.27) 7(0,-1.27) 8(0,1.27) 9(2.54,-1.27) 10(2.54,1.27) 11(5.08,-1.27) 12(5.08,1.27) 13(7.62,-1.27) 14(7.62,1.27)
  silkscreen extent -8.82,-2.47 8.82,2.47, body extent -8.89,-2.54 8.89,2.54, height 8.74
Pinheader_2.54_2x9 [mm] "Pinheader, 2.54mm, gerade, 2-reihig"
  round 1.75 hole 1: 1(-10.16,-1.27) 2(-10.16,1.27) 3(-7.62,-1.27) 4(-7.62,1.27) 5(-5.08,-1.27) 6(-5.08,1.27) 7(-2.54,-1.27) 8(-2.54,1.27) 9(0,-1.27) 10(0,1.27) 11(2.54,-1.27) 12(2.54,1.27) 13(5.08,-1.27) 14(5.08,1.27) 15(7.62,-1.27) 16(7.62,1.27) 17(10.16,-1.27) 18(10.16,1.27)
  silkscreen extent -11.43,-2.47 11.43,2.47, body extent -11.43,-2.54 11.43,2.54, height 8.74
PowerDI123 [mm] "PowerDI123, 2-Leads, Body 1,78x3,70mm, IPC Medium Density"
  rect 2.4x1.5 smd: 1(-0.85,0)
  rect 1.05x1.5 smd: 2(1.525,0)
  silkscreen extent -2.05,1.05 -1.95,1.15, body extent -1.85,-0.96 1.85,0.96, height 1
PW0024A_M [mm] "SOP, 24-Leads, Body 7.9x4.5mm, Pitch 0.65mm, IPC Low Density"
  rrect22% 1.6x0.45 smd: 1(-3.05,3.575) 2(-3.05,2.925) 3(-3.05,2.275) 4(-3.05,1.625) 5(-3.05,0.975) 6(-3.05,0.325) 7(-3.05,-0.325) 8(-3.05,-0.975) 9(-3.05,-1.625) 10(-3.05,-2.275) 11(-3.05,-2.925) 12(-3.05,-3.575) 13(3.05,-3.575) 14(3.05,-2.925) 15(3.05,-2.275) 16(3.05,-1.625) 17(3.05,-0.975) 18(3.05,-0.325) 19(3.05,0.325) 20(3.05,0.975) 21(3.05,1.625) 22(3.05,2.275) 23(3.05,2.925) 24(3.05,3.575)
  silkscreen extent -3.17,-3.95 1.85,4.47, body extent -3.21,-3.9 3.21,3.9, height 1
R-PDSO-G8 [mm] "SOIC, 8-Leads, Body 4,90x3,90mm, Pitch 1,27mm, Thermal Pad 3,10x2,40mm, IPC Medium Density"
  oval 1.45x0.6 smd: 1(-2.725,1.905) 2(-2.725,0.635) 3(-2.725,-0.635) 4(-2.725,-1.905) 5(2.725,-1.905) 6(2.725,-0.635) 7(2.725,0.635) 8(2.725,1.905)
  rect 2.4x3.1 smd: 9(0,0)
  silkscreen extent -2.85,-2.5 1.6,2.88, body extent -3,-2.5 3,2.5, height 1.7
RESC1005X04N [mm] "Chip Resistor, 2-Leads, Body 1,00x0,50mm, IPC Medium Density"
  rrect50% 0.55x0.55 smd: 1(-0.45,0) 2(0.45,0)
  body extent -0.53,-0.28 0.53,0.28, height 0.4
RESC1608X05N [mm] "Chip Resistor, 2-Leads, Body 1,60x0,80mm, IPC Medium Density"
  rrect50% 0.7x0.9 smd: 1(-0.7,0) 2(0.7,0)
  body extent -0.85,-0.45 0.85,0.45, height 0.45
RESC2012X05N [mm] "Chip Resistor, 2-Leads, Body 2,00x1,20mm, IPC Medium Density"
  rrect40% 0.95x1.3 smd: 1(-0.925,0) 2(0.925,0)
  silkscreen extent -0.05,-0.55 0.05,0.55, body extent -1.05,-0.65 1.05,0.65, height 0.5
RESC5025X07N [mm] "Chip Resistor, 2-Leads, Body 5,00x2,50mm, IPC Medium Density"
  rrect30% 1.35x2.7 smd: 1(-2.275,0) 2(2.275,0)
  silkscreen extent -1.2,-1.25 1.2,1.25, body extent -2.6,-1.35 2.6,1.35, height 0.7